# Altium PCB pcb1.PcbDoc (part 1 of 3)
Units mil, origin at the board's own origin, x right, y up, seen from the top; angles counter-clockwise.
Board outline 6735 x 5870 mil, 4 copper layers (Top Layer, Layer 1, Layer 2, Bottom Layer), stack 16.756 mil thick; 178 components, 184 nets, 959 pads, 712 vias.
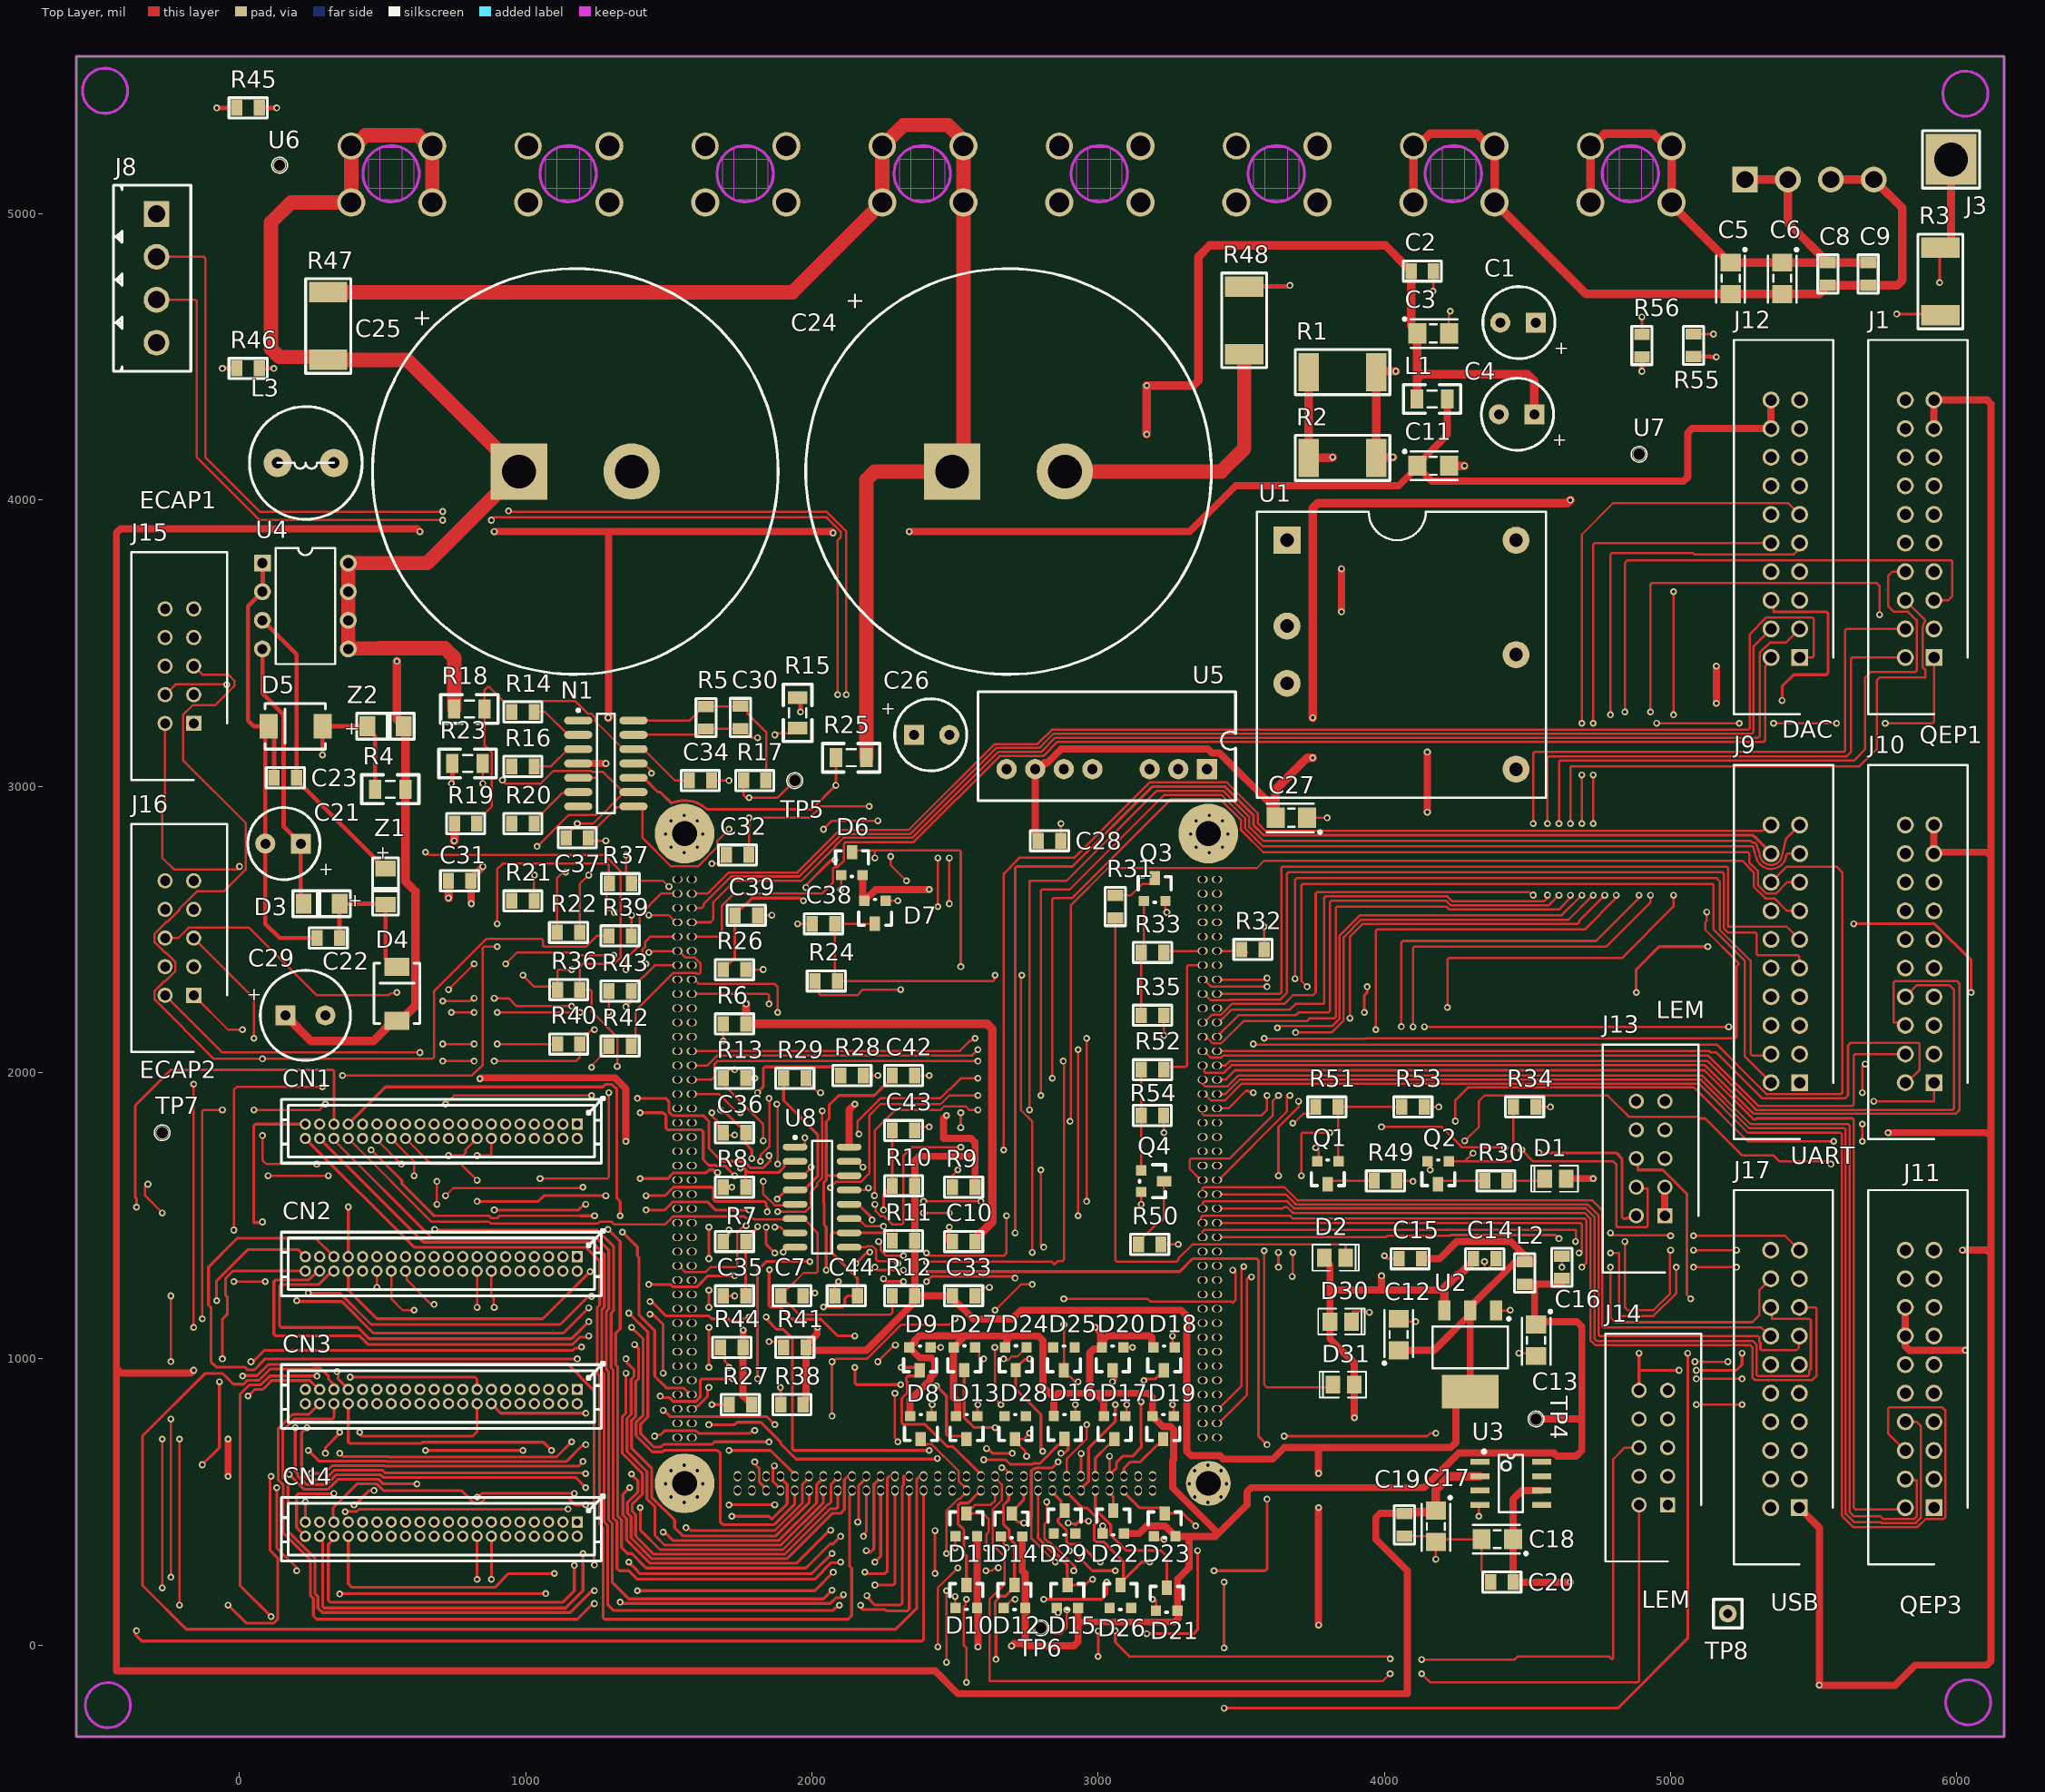
[diagram p0: Top Layer view]
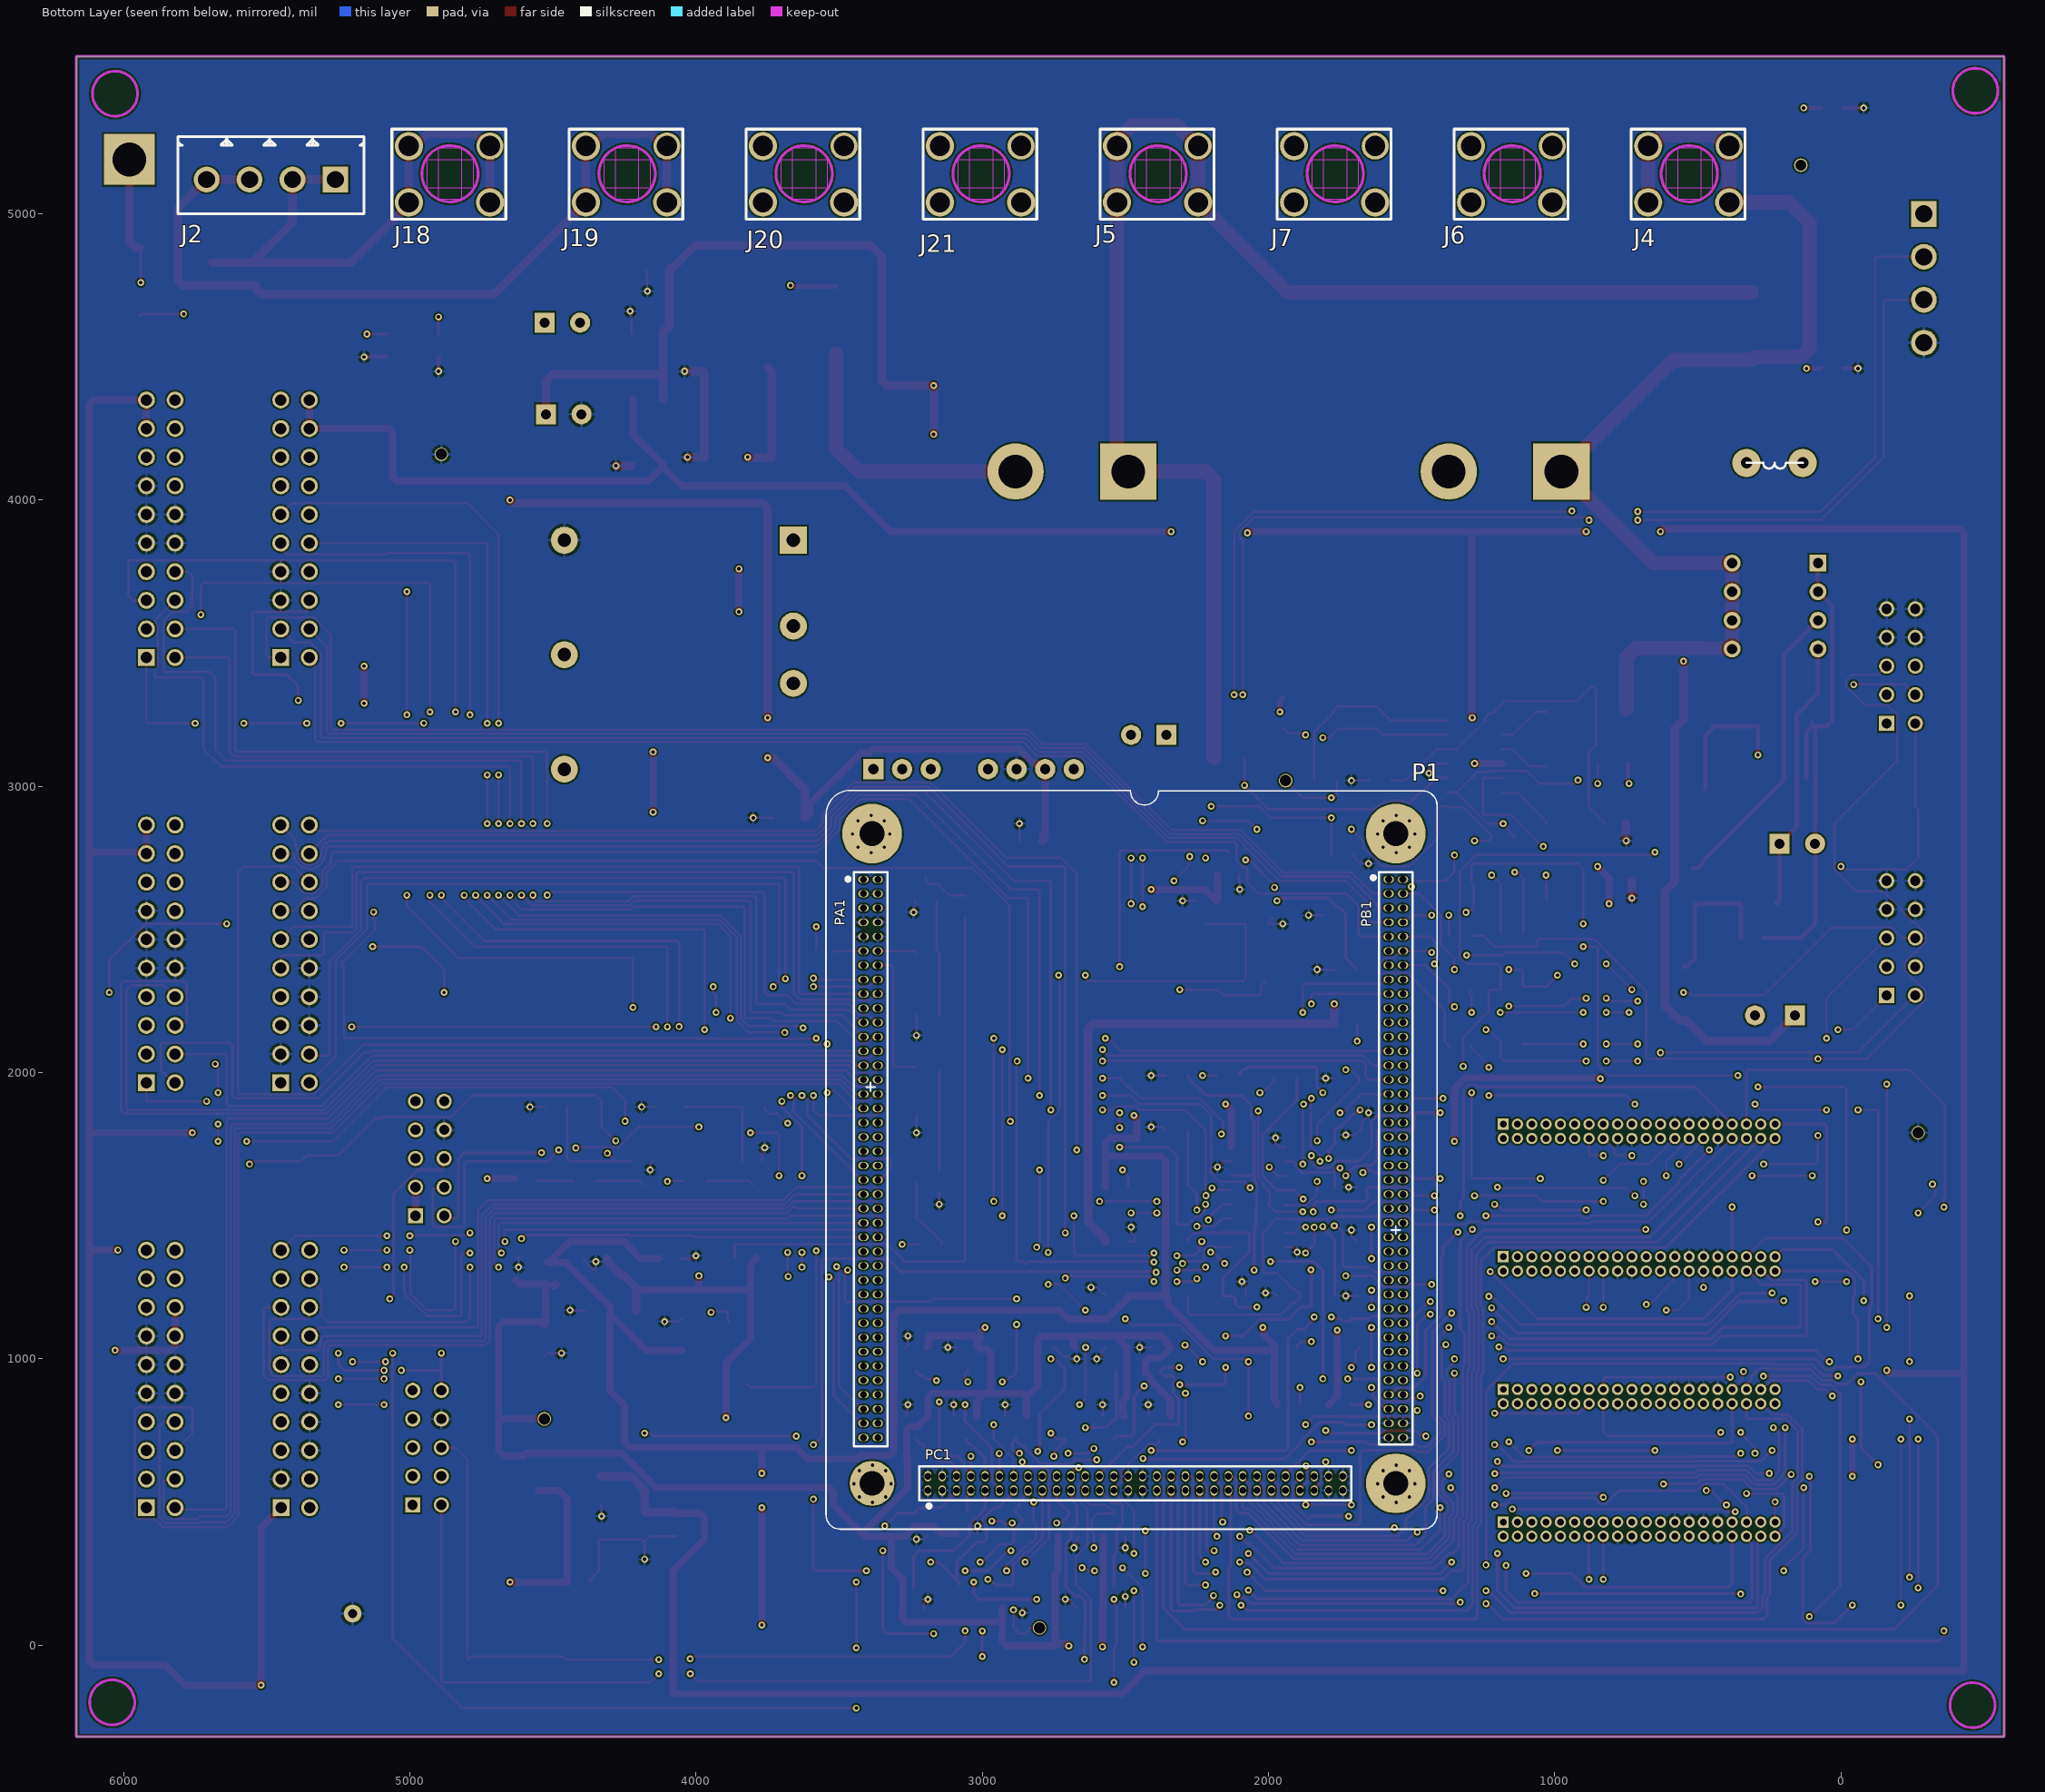
[diagram p1: Bottom Layer view, seen from below]
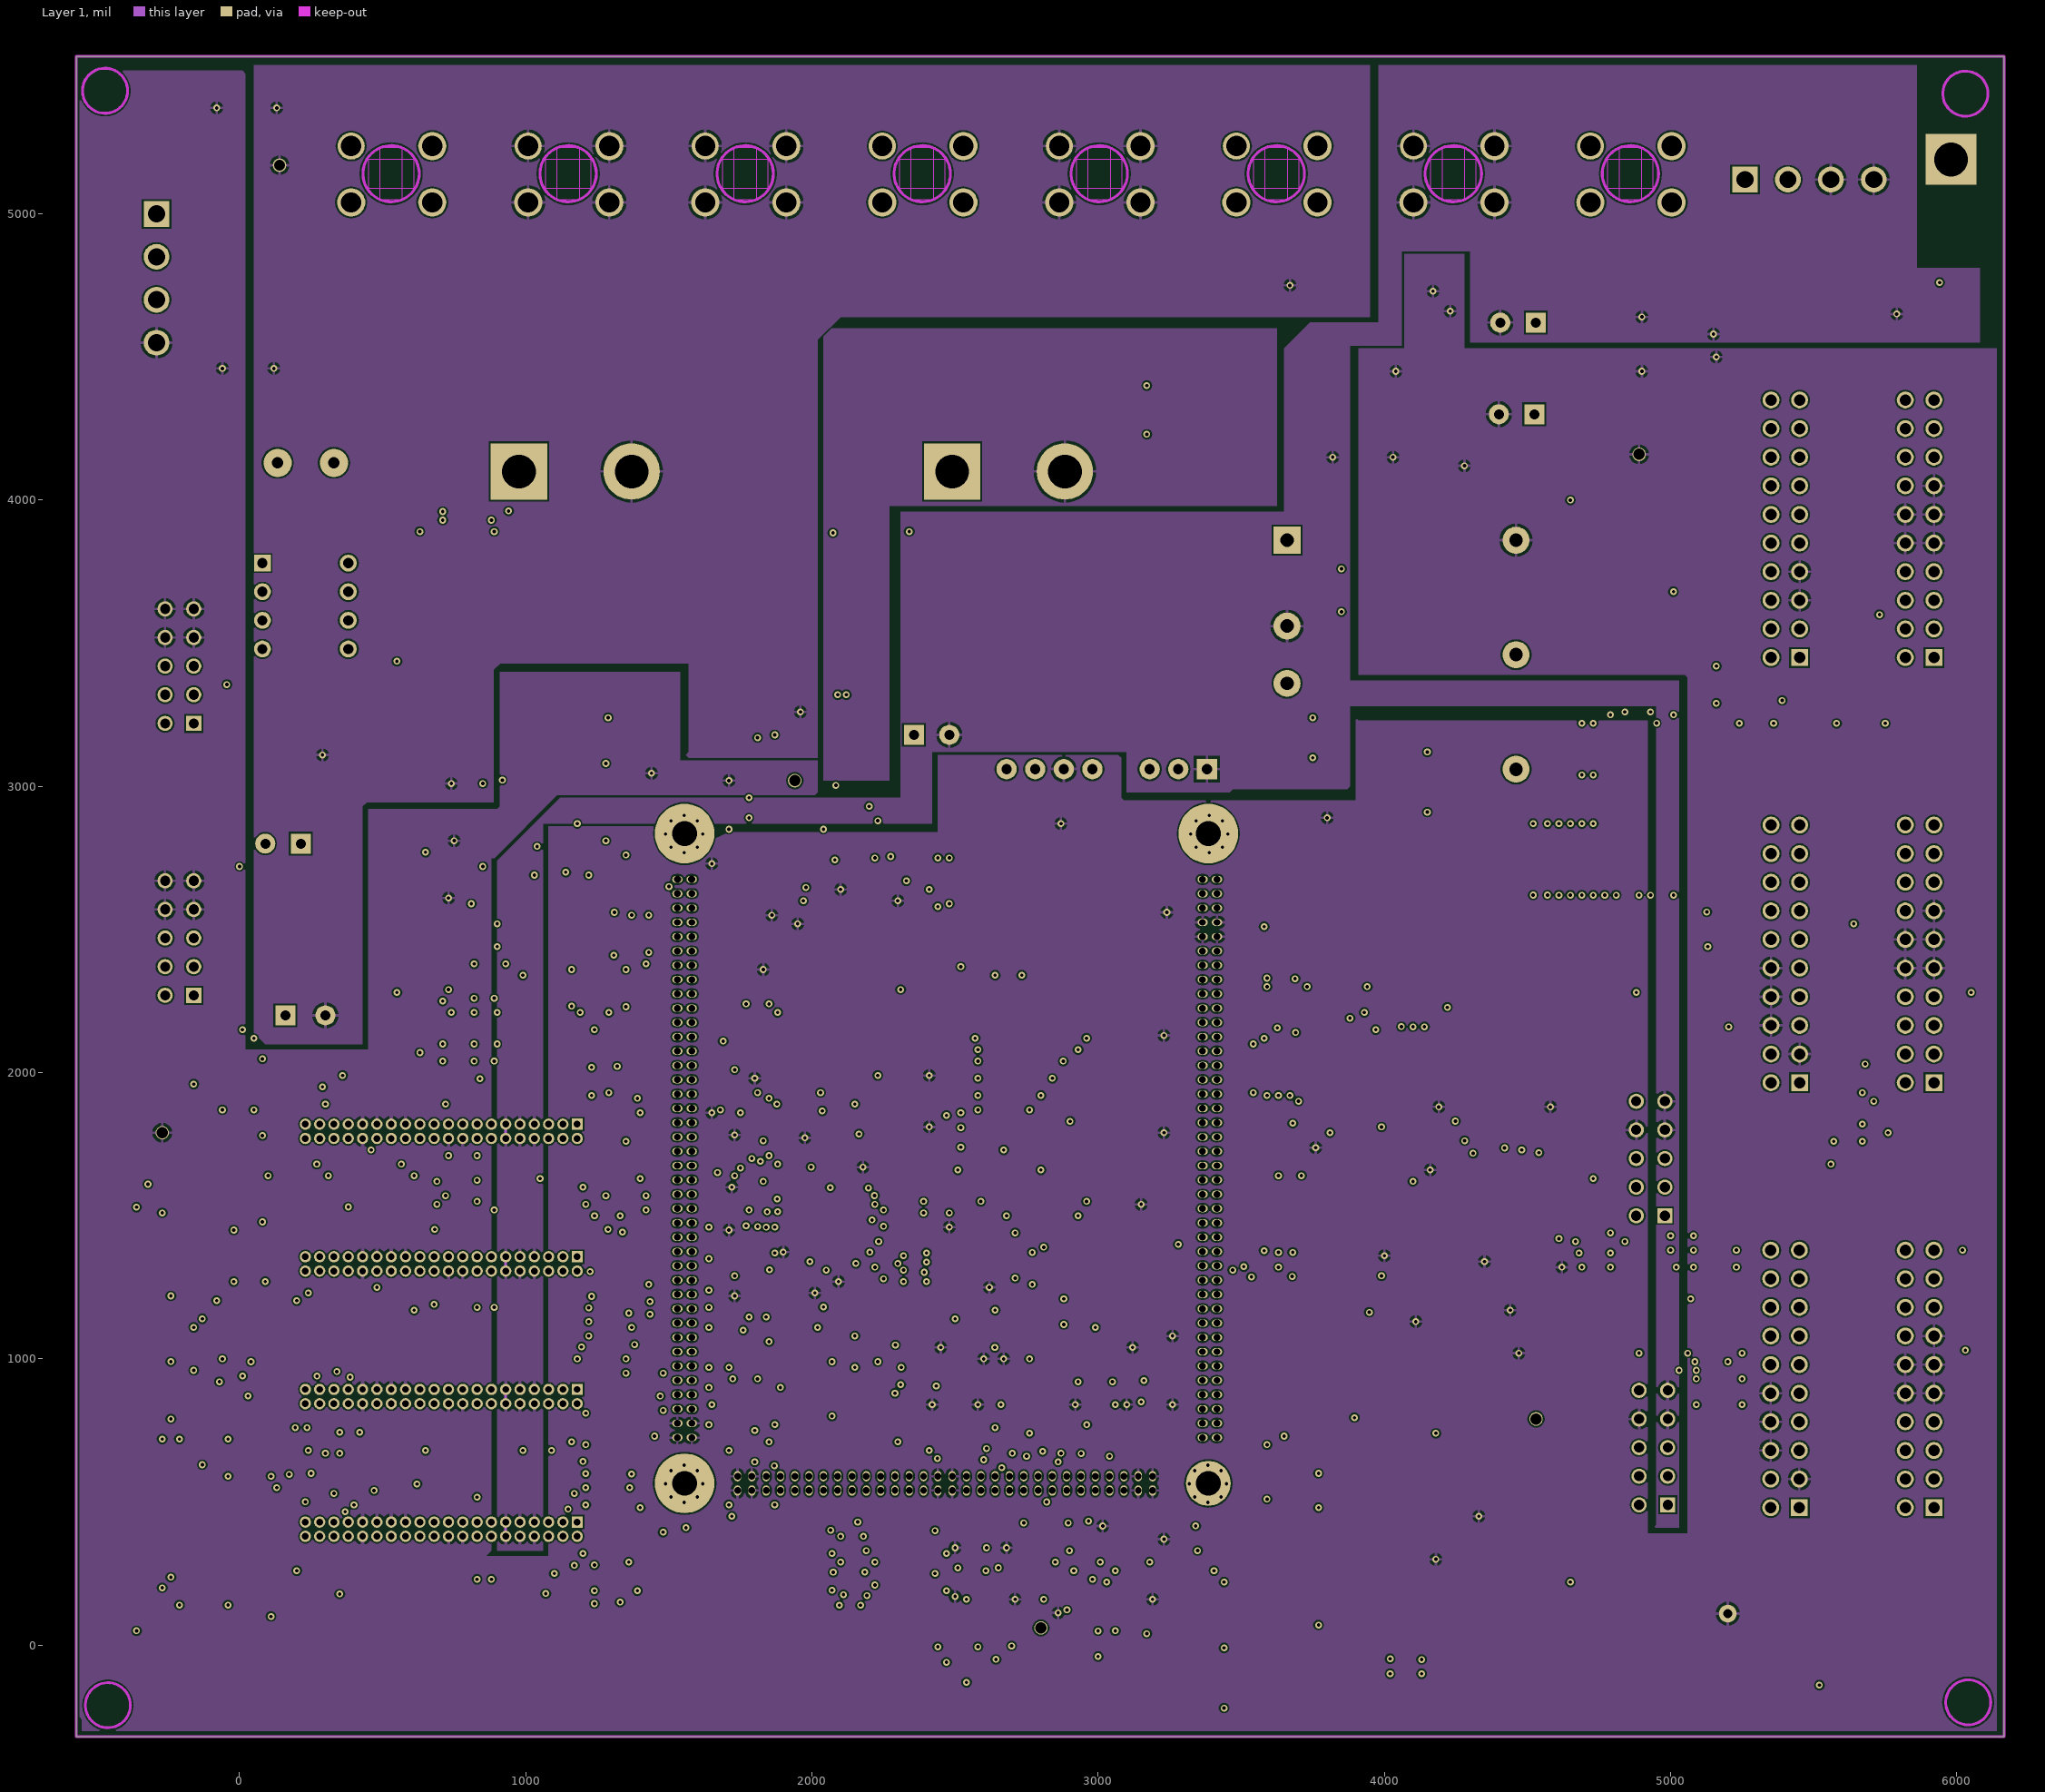
[diagram p2: Layer 1]
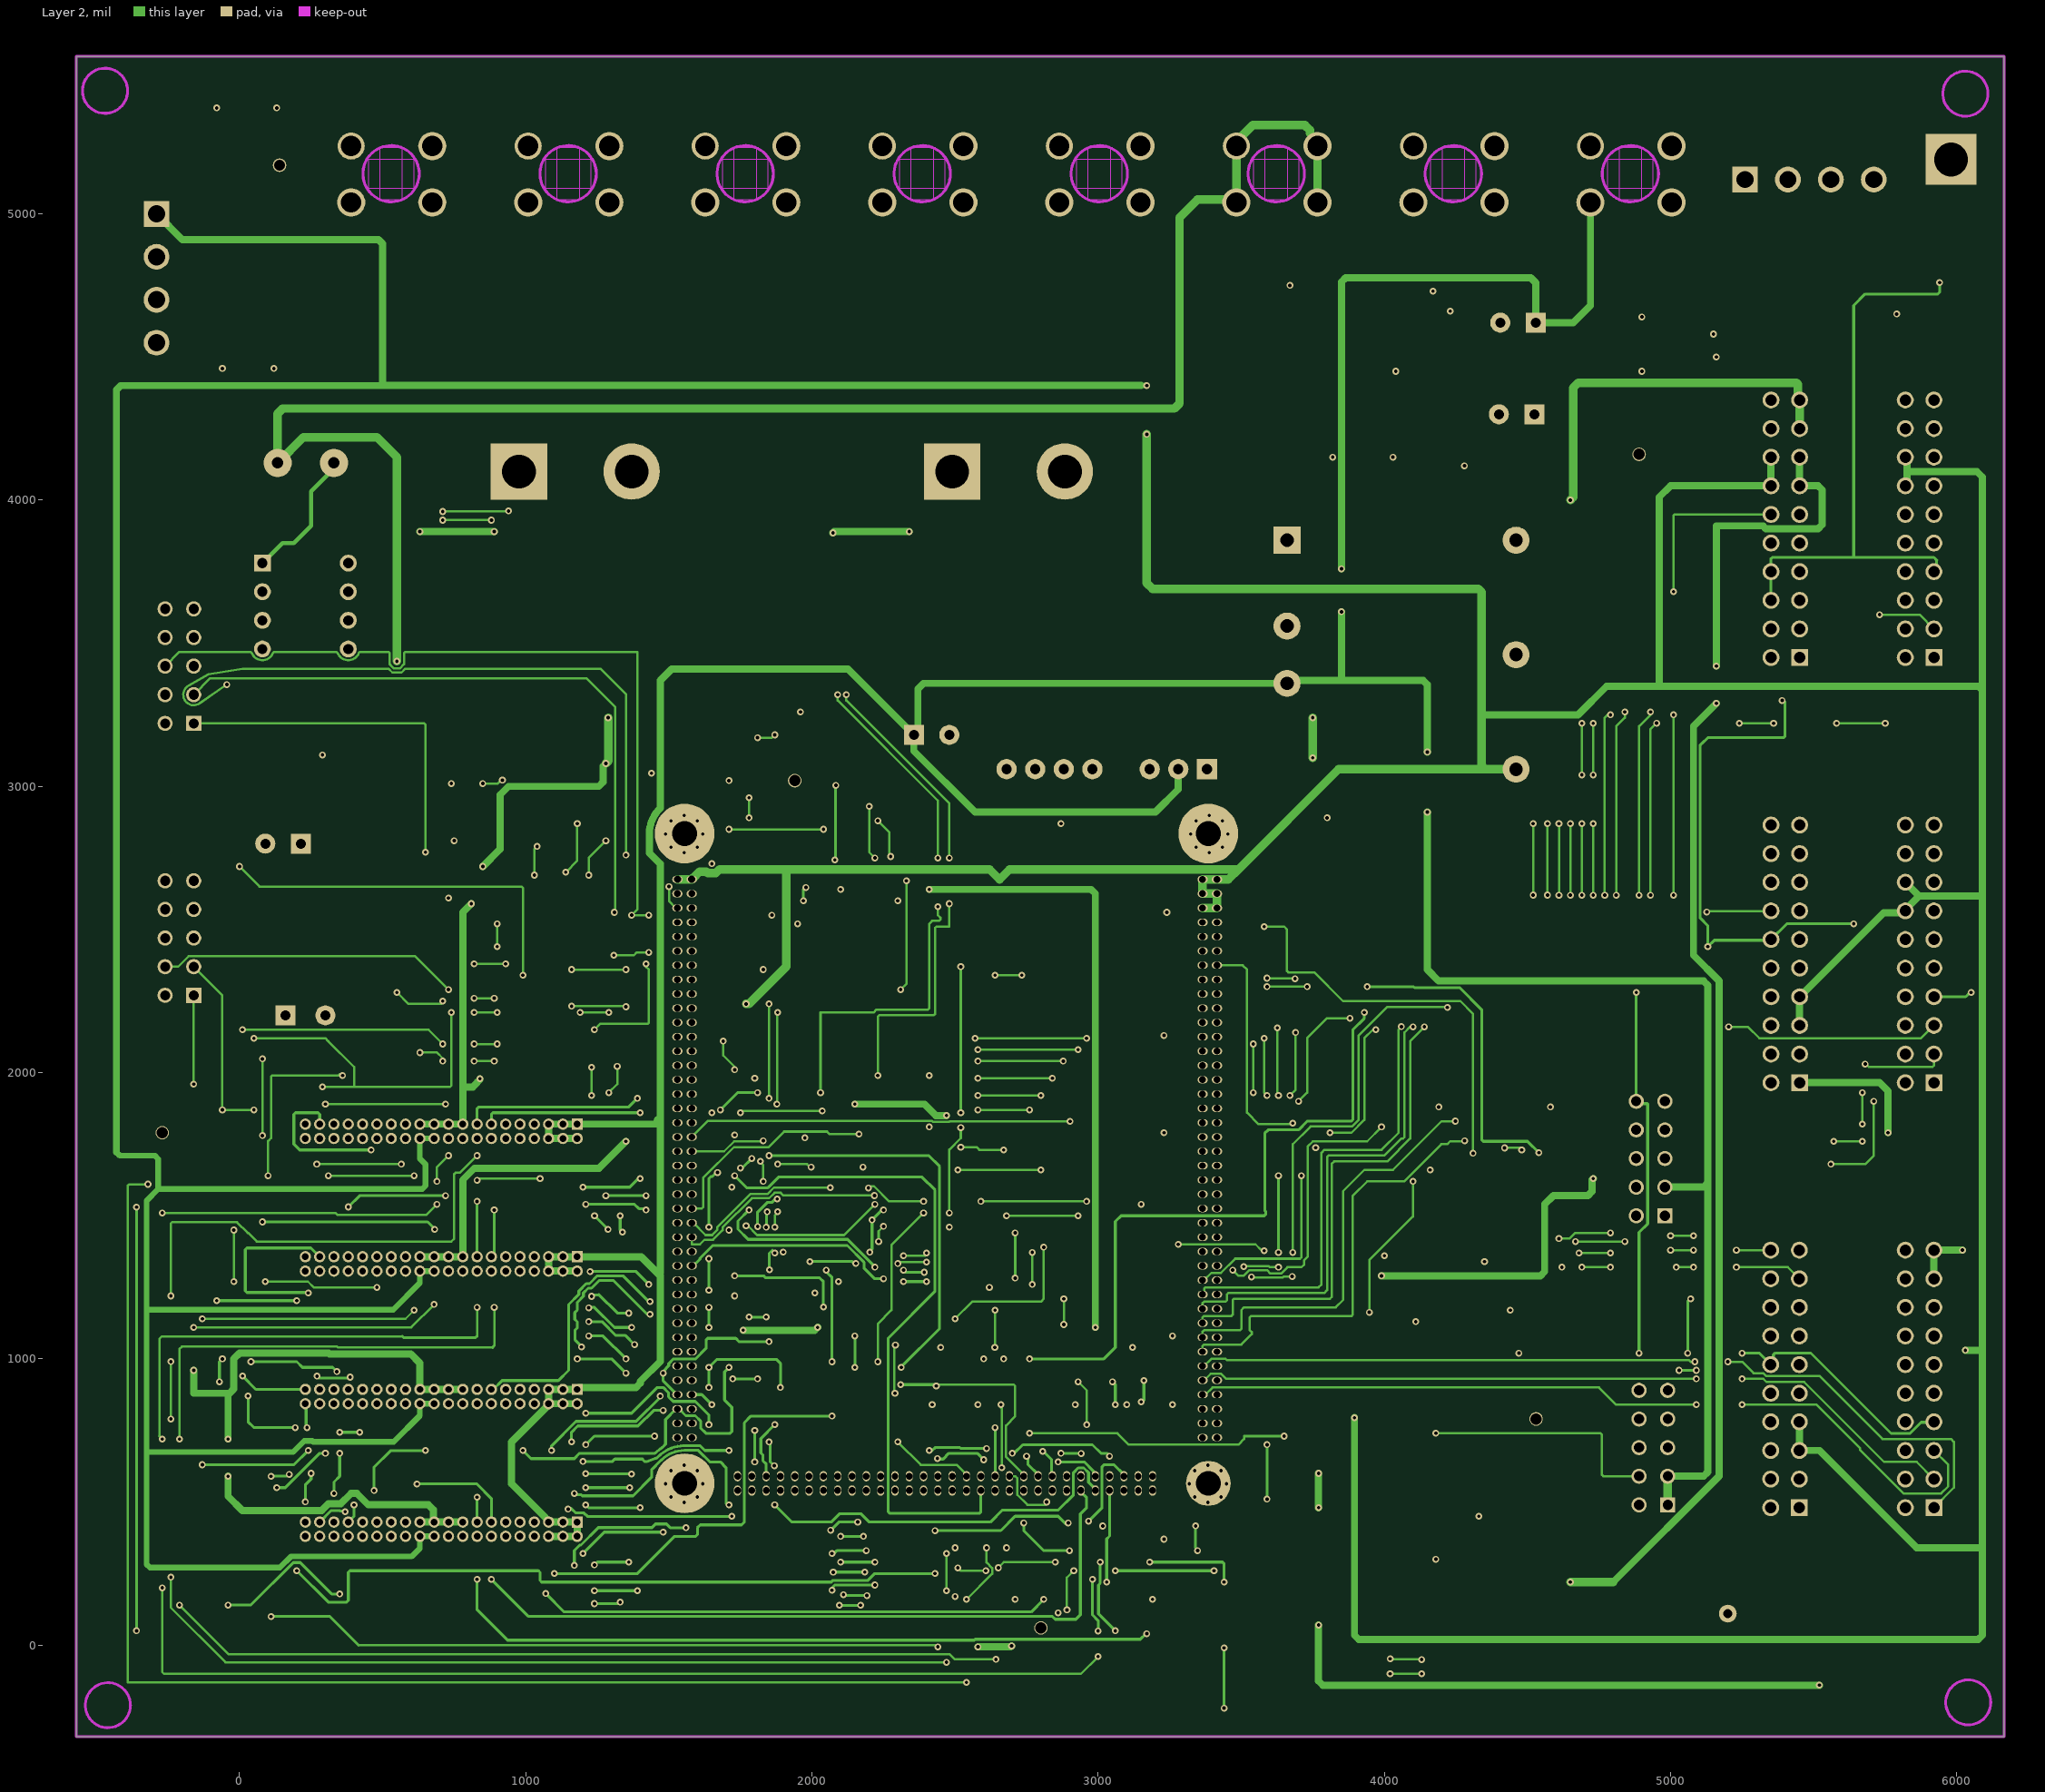
[diagram p3: Layer 2]

## Layer stack, top to bottom
Top Solder: solder mask 0.4, Solder Resist, Dk 3.5
Top Layer: signal copper 1.4
Dielectric 2: prepreg 2.8, PP-006, Dk 4.1
Layer 1: signal copper 1.378
Dielectric 1: dielectric 5.6, FR-4, Dk 4.8
Layer 2: signal copper 1.378
Dielectric 3: prepreg 2.8, PP-006, Dk 4.1
Bottom Layer: signal copper 1.4
Bottom Solder: solder mask 0.4, Solder Resist, Dk 3.5

## Board outline
-570,-320 -570,5550 6165,5550 6165,-320

## Design rules (kind name [scope] priority, off if disabled: settings)
Clearance [All] p1: gap=6 ignorepadtopadclearanceinfootprint=FALSE
HoleSize [All] p1: absolutevalues=TRUE maxlimit=120 minlimit=1 maxpercent=80.000 minpercent=20.000
MinimumSolderMaskSliver [All] p1: minsoldermaskwidth=0
PolygonConnect [All] p1: connectstyle=Relief reliefconductorwidth=10 reliefentries=4 polygonreliefangle="90 Angle" airgapwidth=10
RoutingVias [All] p1: holewidth=12 width=24 viastyle="Through Hole" minholewidth=10 minwidth=20 maxholewidth=120 maxwidth=150
SilkToSilkClearance [All] p1: silktosilkclearance=0
SilkToSolderMaskClearance [IsPad] p1: minsilkscreentomaskgap=0 clearancetoexposedcopper=TRUE
SolderMaskExpansion [All] p1: expansion=4 istentingtop=FALSE
Width [All] p1: maxlimit=60 minlimit=5 preferedwidth=15
26 further rules are at their usual default settings.

## Classes and differential pairs
net class SectionConnector: -5V_ADC \S\P\I\_\C\_\S\T\E\_\H\S A+5V AGND AVDD D12V1 D12VGND D+5V DSP-PWM1A DSP-PWM1B DSP-PWM2A DSP-PWM2B DSP-PWM3A DSP-PWM3B DSP-PWM4A DSP-PWM4B DSP-PWM5A DSP-PWM5B DSP-PWM6A DSP-PWM6B DSP-PWM7A DSP-PWM7B DSP-PWM8A DSP-PWM8B DSP-PWM9A DSP-PWM9B DSP-PWM10A DSP-PWM10B DSP-PWM11A DSP-PWM11B DSP-PWM12A DSP-PWM12B DSP_A_CAN_RX DSP_A_CAN_TX DSP_B_CAN_RX DSP_B_CAN_TX DSP_PWM1_\E\N\A\B\L\E DSP_PWM1_F\A\U\L\T\_\5\V\ DSP_PWM2_\E\N\A\B\L\E DSP_PWM2_F\A\U\L\T\_\5\V\ DSP_PWM3_\E\N\A\B\L\E DSP_PWM3_F\A\U\L\T\_\5\V\ DSP_PWM4_\E\N\A\B\L\E DSP_PWM4_F\A\U\L\T\_\5\V\ IPM_IU1 IPM_IU2 IPM_IU3 IPM_IU4 IPM_IV1 IPM_IV2 IPM_IV3 IPM_IV4 IPM_IW1 IPM_IW2 IPM_IW3 IPM_IW4 IPM_Temperature1 IPM_Temperature2 IPM_Temperature3 IPM_Temperature4 IPM_TerminalDutyU1 IPM_TerminalDutyU2 IPM_TerminalDutyU3 IPM_TerminalDutyU4 IPM_TerminalDutyV1 IPM_TerminalDutyV2 IPM_TerminalDutyV3 IPM_TerminalDutyV4 IPM_TerminalDutyW1 IPM_TerminalDutyW2 IPM_TerminalDutyW3 IPM_TerminalDutyW4 MQEP1A MQEP1B MQEP1S MQEP1Z MQEP2A MQEP2B MQEP2S MQEP2Z MQEP3A MQEP3B MQEP3S MQEP3Z NetU3_1 NetU3_3 NetU3_5 NetU3_7 NetU3_8 NetU5_3 NetU5_5 NetU5_8 PE_GND QEP1_HALL_U QEP1_HALL_V QEP1_HALL_W QEP2_HALL_U QEP2_HALL_V QEP2_HALL_W QEP3_HALL_U QEP3_HALL_V QEP3_HALL_W REF_3V S\P\I\_\A\_\S\T\E\_\H\S\ SPI_A_CK_HS SPI_A_MI_HS SPI_A_MO_HS SPI_C_CK_HS SPI_C_MI_HS SPI_C_MO_HS UART_SCI_RXDA UART_SCI_RXDB UART_SCI_RXDC UART_SCI_RXDD UART_SCI_TXDA UART_SCI_TXDB UART_SCI_TXDC UART_SCI_TXDD VCO_ECAP1 VCO_ECAP2 VCO_ECAP3 VCO_ECAP4 VCO_ECAP5 VCO_ECAP6 VDD
net class HV: DC_BUS DC_BUS_SUS GND GND_SUS

## Components (designator, comment, footprint, x,y, rotation, side; value= is the part's Value field where it differs from the comment)
C1 "100uf 25V 贴片铝电解" "CAP/6.4mm -" 4570,4620 r180 top
C2 "105" 0805 4132.78,4800 r0 top value=0.1UF
C3 "22uf 16V" "1206 (钽电容)" 4115.61,4582.34 r0 top
C4 "100uf 25V 贴片铝电解" "CAP/6.4mm -" 4565,4300 r180 top
C5 "22uf 16V" "1206 (钽电容)" 5210,4830 r270 top
C6 "22uf 16V" "1206 (钽电容)" 5390,4830 r270 top
C7 "103" 0805 1930,1220 r0 top
C8 "104" 0805 5550,4790 r90 top
C9 "104" 0805 5690,4790 r90 top
C10 "104" 0805 2530,1410 r0 top
C11 "22uf 16V" "1206 (钽电容)" 4115.61,4120 r0 top
C12 "22uf 16V" "1206 (钽电容)" 4050,1029.76 r90 top
C13 "10uf 6.3V" "1206 (钽电容)" 4530,1120.24 r270 top
C14 "104" 0805 4350.63,1350 r180 top
C15 "104" 0805 4090,1350 r0 top
C16 "104" 0805 4620,1320 r270 top
C17 "106 25V" "1206 (钽电容)" 4180,470.24 r270 top value=100pF
C18 "106 25V" "1206 (钽电容)" 4450,370 r180 top value=100pF
C19 "104" 0805 4070,420 r90 top
C20 "104" 0805 4410.63,220 r0 top
C21 "10uF/35V" "CAP/6.4mm -" 255,2800 r180 top
C22 "104" 0805 310,2470 r0 top
C23 "223" 0805 160,3030 r0 top
C24 "390uF/450V" CAP/30mm 2686.85,4100 r0 top
C25 "390uF/450V" CAP/30mm 1173.15,4100 r0 top
C26 "100uf 25V 贴片铝电解" "CAP/6.4mm -" 2315,3180 r0 top
C27 "22uf 16V" "1206 (钽电容)" 3730.24,2890 r180 top
C28 "104" 0805 2830,2810 r180 top value=0.1UF
C29 "470uF/25V" CAP/8mm 130,2200 r0 top
C30 "102" 0805 1750,3240.63 r90 top value=1nF
C31 "104" 0805 769.08,2670 r0 top
C32 "103" 0805 1740,2760 r0 top value=0.01uF
C33 "104" 0805 2530,1220 r0 top value=0.1uF
C34 "102" 0805 1610,3020 r180 top value=1nF
C35 "103" 0805 1729.37,1220 r0 top
C36 "103" 0805 1729.37,1790 r0 top
C37 "102" 0805 1180,2820 r0 top value=1nF
C38 "103" 0805 2040,2520 r0 top value=0.01uF
C39 "102" 0805 1770.63,2550 r180 top value=1nF
C42 "101" 0805 2320,1990 r0 top
C43 "101" 0805 2320,1797.5 r0 top
C44 "101" 0805 2120,1220 r180 top
CN1 "3131-40SG0BK00T1" IDC-TH_3131-40SG0BK00T1 705,1795 r180 top
CN2 "3131-40SG0BK00T1" IDC-TH_3131-40SG0BK00T1 705,1331.67 r180 top
CN3 "3131-40SG0BK00T1" IDC-TH_3131-40SG0BK00T1 705,868.33 r180 top
CN4 "3131-40SG0BK00T1" IDC-TH_3131-40SG0BK00T1 705,405 r180 top
D1 "LEDRED" L0805 4634.8,1629.28 r0 top
D2 "LEDGREEN" L0805 3790,1353.33 r180 top
D3 "1N4148" LL4148 287.01,2590 r180 top
D4 "MURS220T3" DO214AA 550.26,2181.31 r90 top
D5 "MURS220T3" DO214AA 290,3210 r180 top
D6 "BAR43S" SOT-23 2102.02,2690.41 r0 top
D7 "BAR43S" SOT-23 2257.98,2599.59 r180 top
D8 "BAR43S" SOT-23 2417.98,799.59 r180 top
D9 "BAR43S" SOT-23 2414.98,1039.59 r180 top
D10 "BAR43S" SOT-23 2502.02,130.41 r0 top
D11 "BAR43S" SOT-23 2502.02,380.41 r0 top
D12 "BAR43S" SOT-23 2670,130 r0 top
D13 "BAR43S" SOT-23 2577.98,799.59 r180 top
D14 "BAR43S" SOT-23 2660,380 r0 top
D15 "BAR43S" SOT-23 2855.02,130.41 r0 top
D16 "BAR43S" SOT-23 2920,800 r180 top
D17 "BAR43S" SOT-23 3094.98,799.59 r180 top
D18 "BAR43S" SOT-23 3267.98,1039.59 r180 top
D19 "BAR43S" SOT-23 3264.98,799.59 r180 top
D20 "BAR43S" SOT-23 3087.98,1039.59 r180 top
D21 "BAR43S" SOT-23 3202.02,120.41 r0 top
D22 "BAR43S" SOT-23 3015.02,390.41 r0 top
D23 "BAR43S" SOT-23 3195.02,380.41 r0 top
D24 "BAR43S" SOT-23 2750,1040 r180 top
D25 "BAR43S" SOT-23 2917.98,1039.59 r180 top
D26 "BAR43S" SOT-23 3040,130 r0 top
D27 "BAR43S" SOT-23 2570,1040 r180 top
D28 "BAR43S" SOT-23 2747.98,799.59 r180 top
D29 "BAR43S" SOT-23 2845.02,390.41 r0 top
D30 "LEDRED" L0805 3810,1130 r180 top
D31 "LEDGREEN" L0805 3894.8,910 r0 top
J1 "HIF3FC-20PA-2.54DSA" SHDR20W56P254_2X10_3290X850X950P 5920,3450 r90 top
J2 "Header 4" 381S-4 5260,5120 r0 bottom
J3 "Header 2" 接地柱M3 5980,5190 r0 top
J4 "Header 2" PCB焊接端子 669.53,5020.31 r90 bottom
J5 "Header 2" PCB焊接端子 2525.24,5020.31 r90 bottom
J6 "Header 2" PCB焊接端子 1288.1,5020.31 r90 bottom
J7 "Header 2" PCB焊接端子 1906.67,5020.31 r90 bottom
J8 "Header 4" 381S-4 -290,5000 r270 top
J9 "HIF3FC-20PA-2.54DSA" SHDR20W56P254_2X10_3290X850X950P 5450.91,1965 r90 top
J10 "HIF3FC-20PA-2.54DSA" SHDR20W56P254_2X10_3290X850X950P 5920,1965 r90 top
J11 "HIF3FC-20PA-2.54DSA" SHDR20W56P254_2X10_3290X850X950P 5920,480 r90 top
J12 "HIF3FC-20PA-2.54DSA" SHDR20W56P254_2X10_3290X850X950P 5450.91,3450 r90 top
J13 "HIF3FC-10PA-2.54DSA" SHDR10W50P254_2X5_2020X850X920P 4980,1500 r90 top
J14 "HIF3FC-10PA-2.54DSA" SHDR10W50P254_2X5_2020X850X920P 4990,490 r90 top
J15 "HIF3FC-10PA-2.54DSA" SHDR10W50P254_2X5_2020X850X920P -160,3220 r90 top
J16 "HIF3FC-10PA-2.54DSA" SHDR10W50P254_2X5_2020X850X920P -160,2270 r90 top
J17 "HIF3FC-20PA-2.54DSA" SHDR20W56P254_2X10_3290X850X950P 5450,480 r90 top
J18 "Header 2" PCB焊接端子 4999.53,5020.31 r90 bottom
J19 "Header 2" PCB焊接端子 4380.96,5020.31 r90 bottom
J20 "Header 2" PCB焊接端子 3762.38,5020.31 r90 bottom
J21 "Header 2" PCB焊接端子 3143.81,5020.31 r90 bottom
L1 "CIB31P310NE" 1206 4113.7,4353.23 r0 top
L2 "BLM21PG221SH1D" 0805 4490,1300 r270 top value=BLM21PG221SH1
L3 "2.2mH工字/3A" L\5\10 133.15,4130 r0 top
N1 "MCP6024" SOIC14_M 1280,3080 r0 top
P1 "TMS320F28377D-BGA-Core" DSP_240_0p6mm 3185,15 r180 bottom
Q1 "FMMT618TA" SOT-23 3840,1689.59 r180 top
Q2 "FMMT618TA" SOT-23 4225.76,1689.59 r180 top
Q3 "FMMT618TA" SOT-23 3160,2600 r0 top
Q4 "FMMT618TA" SOT-23 3150.41,1657.98 r270 top
R1 "DNP" 2512 3850,4460 r0 top
R2 "DNP" 2512 3850,4160 r0 top
R3 "DNP" 2512 5930,4760 r90 top
R4 "2K" 1206 580,2990 r180 top
R5 "10K" 0805 1630,3240 r90 top
R6 "1.69K" 0805 1729.37,2170 r0 top value=300R
R7 "1K" 0805 1729.37,1410 r180 top
R8 "1K" 0805 1729.37,1600 r180 top
R9 "1K" 0805 2530,1600 r180 top
R10 "1K" 0805 2320,1605 r180 top
R11 "1K" 0805 2320,1412.5 r180 top
R12 "1K" 0805 2320,1220 r180 top
R13 "3,.3K" 0805 1729.37,1980 r180 top value=300R
R14 "0R" 0805 990,3260 r180 top
R15 "2004" 1206 1950,3310 r270 top value=2M
R16 "0R" 0805 990,3070 r180 top
R17 "1k" 0805 1800,3020 r180 top value=1K
R18 "2004" 1206 750,3270 r0 top value=2M
R19 "10K" 0805 790,2870 r0 top
R20 "0R" 0805 990,2870 r180 top
R21 "0R" 0805 990,2600 r180 top
R22 "10K" 0805 1149.37,2490 r0 top
R23 "2004" 1206 743.7,3080 r0 top value=2M
R24 "1k" 0805 2050,2320 r0 top value=1K
R25 "2004" 1206 2190,3100 r180 top value=2M
R26 "10K" 0805 1729.37,2360 r180 top
R27 "10K" 0805 1750,840 r0 top
R28 "100R" 0805 2140,1990 r180 top
R29 "100R" 0805 1940,1980 r180 top
R30 "301R" 0805 4389.59,1621.43 r0 top value=300R
R31 "301R" 0805 3060,2580 r270 top value=300R
R32 "10K" 0805 3540.63,2430 r180 top
R33 "10K" 0805 3190,2420 r0 top
R34 "2K" 0805 4490,1880 r0 top
R35 "2K" 0805 3190,2200 r0 top
R36 "0R" 0805 1150,2290 r0 top
R37 "0R" 0805 1330.63,2660 r180 top
R38 "10K" 0805 1930,840 r0 top
R39 "0R" 0805 1329.37,2477.5 r180 top
R40 "0R" 0805 1150,2100 r180 top
R41 "10K" 0805 1940,1040 r0 top
R42 "0R" 0805 1329.37,2092.5 r180 top
R43 "0R" 0805 1329.37,2285 r180 top
R44 "10K" 0805 1720,1040 r0 top
R45 "0R" 0805 30,5370 r180 top
R46 "0R" 0805 30,4460 r180 top
R47 "DNP" 2512 322.74,4611.91 r270 top
R48 "DNP" 2512 3497.26,4624.31 r90 top
R49 "301R" 0805 4003.83,1621.43 r0 top value=300R
R50 "301R" 0805 3180,1400 r0 top value=300R
R51 "10K" 0805 3799.37,1880 r180 top
R52 "10K" 0805 3190,2010 r0 top
R53 "2K" 0805 4100,1880 r0 top
R54 "2K" 0805 3189.37,1850 r0 top
R55 "0R" 0805 5080,4540.63 r270 top
R56 "0R" 0805 4900,4540 r270 top
TP4 "TP-黄色测试点" TESTPOINT-TH_BD1.0#1 4530,790 r90 top
TP5 "TP-黄色测试点" TESTPOINT-TH_BD1.0#1 1940,3020 r90 top
TP6 "TP-黄色测试点" TESTPOINT-TH_BD1.0#1 2800,60 r90 top
TP7 "TP-黄色测试点" TESTPOINT-TH_BD1.0#1 -270,1790 r90 top
TP8 "AGND 黑色测试点" TP 5200,110 r0 top
U1 "URB2405YMD-15W" URB-YMD-15WR3 3660,3860 r0 top
U2 "ams1117-3.3" SOT-223 4300,1040 r180 top
U3 "ADR423ARZ" SOIC-8 4333.46,640 r0 top value=Value
U4 "VIPER22A" DIP8 230,3630 r270 top
U5 "VRB1205S-6WR3" VRB_S-6WR3 3380,3060 r270 top
U6 "TP-黄色测试点" TESTPOINT-TH_BD1.0#2 140,5170 r0 top
U7 "TP-黄色测试点" TESTPOINT-TH_BD1.0#1 4890,4160 r0 top
U8 "SN74HC365D" D016_N 2035.51,1565 r0 top
Z1 "15V -ZM4744" LL4148 510,2650 r270 top
Z2 "15V-ZM4744" LL4148 510,3210 r0 top

## Footprints (in the part's own frame and the unit in brackets; to place one, negate y for a bottom-side part, rotate by r counter-clockwise, add the part's x,y. Pads: shape width x height; smd on the part's side, far side on the other; paste and mask are expansions set on the pad)
381S-4 [mil]
  rect 90x90 hole 60: 1(0,0)
  round 90 hole 60: 2(150,0) 3(300,0) 4(450,0)
  silkscreen extent -100,-150 550,120
0805 [mm]
  rect 1x1.4 smd: 1(-1,0) 2(1,0)
  silkscreen extent -1.7,-0.9 1.7,0.9
1206 [mm]
  rect 1.1x1.7 smd: 1(0,0) 2(2.7,0)
  silkscreen extent -1.19,-1.27 3.89,1.27, body extent -0.35,-0.9 3.05,0.9, height 1.3
"1206 (钽电容)" [mm]
  rect 1.6x1.8 smd: 1(0,0) 2(2.8,0)
  silkscreen extent -1.27,-1.27 3.56,1.39
2512 [mm]
  rect 1.8x3.4 smd: 1(-2.903,-0.324) 2(3.097,-0.324)
  silkscreen extent -4.1,-2.32 4.3,1.68
"CAP/6.4mm -" [mil]
  rect 70x70 hole 35: 1(41,0)
  round 70 hole 35: 2(165,0)
  silkscreen extent -26,-126 226,126
CAP/8mm [mil]
  rect 70x70 hole 35: 1(30,0)
  round 70 hole 35: 2(170,0)
  silkscreen extent -57,-157 257,157
CAP/30mm [mm]
  rect 5x5 hole 3: 1(-5,0)
  round 5 hole 3: 2(5,0)
  silkscreen extent -18,-18 18,18
D016_N [mm]
  oval 2.2x0.6 smd: 1(-2.4,4.445) 2(-2.4,3.175) 3(-2.4,1.905) 4(-2.4,0.635) 5(-2.4,-0.635) 6(-2.4,-1.905) 7(-2.4,-3.175) 8(-2.4,-4.445) 9(2.4,-4.445) 10(2.4,-3.175) 11(2.4,-1.905) 12(2.4,-0.635) 13(2.4,0.635) 14(2.4,1.905) 15(2.4,3.175) 16(2.4,4.445)
  silkscreen extent -2.52,-5 0.9,5.42
DIP8 [mm]
  rect 1.5x1.5 hole 0.9: 1(-3.81,-3.81)
  round 1.5 hole 0.9: 2(-1.27,-3.81) 3(1.27,-3.81) 4(3.81,-3.81) 5(3.81,3.81) 6(1.27,3.81) 7(-1.27,3.81) 8(-3.81,3.81)
  silkscreen extent -5.15,-2.65 5.15,2.65
DO214AA [mm]
  rect 1.6x2.2 smd: 1(-0.007,0.007) 2(4.793,0.007)
  silkscreen extent -0.26,-2.03 5.11,2.04
DSP_240_0p6mm [mil] "The hole size is reduced to 0.6 mm"
  oval 36x25 hole 23.62: 1(-230,2660) 2(-180,2660) 3(-230,2610) 4(-180,2610) 5(-230,2560) 6(-180,2560) 7(-230,2510) 8(-180,2510) 9(-230,2460) 10(-180,2460) 11(-230,2410) 12(-180,2410) 13(-230,2360) 14(-180,2360) 15(-230,2310) 16(-180,2310) 17(-230,2260) 18(-180,2260) 19(-230,2210) 20(-180,2210) 21(-230,2160) 22(-180,2160) 23(-230,2110) 24(-180,2110) 25(-230,2060) 26(-180,2060) 27(-230,2010) 28(-180,2010) 29(-230,1960) 30(-180,1960) 31(-230,1910) 32(-180,1910) 33(-230,1860) 34(-180,1860) 35(-230,1810) 36(-180,1810) 37(-230,1760) 38(-180,1760) 39(-230,1710) 40(-180,1710) 41(-230,1660) 42(-180,1660) 43(-230,1610) 44(-180,1610) 45(-230,1560) 46(-180,1560) 47(-230,1510) 48(-180,1510) 49(-230,1460) 50(-180,1460) 51(-230,1410) 52(-180,1410) 53(-230,1360) 54(-180,1360) 55(-230,1310) 56(-180,1310) 57(-230,1260) 58(-180,1260) 59(-230,1210) 60(-180,1210) 61(-230,1160) 62(-180,1160) 63(-230,1110) 64(-180,1110) 65(-230,1060) 66(-180,1060) 67(-230,1010) 68(-180,1010) 69(-230,960) 70(-180,960) 71(-230,910) 72(-180,910) 73(-230,860) 74(-180,860) 75(-230,810) 76(-180,810) 77(-230,760) 78(-180,760) 79(-230,710) 80(-180,710) 83(1605,2610) 84(1655,2610) 85(1605,2560) 86(1655,2560) 87(1605,2510) 88(1655,2510) 89(1605,2460) 90(1655,2460) 91(1605,2410) 92(1655,2410) 93(1605,2360) 94(1655,2360) 95(1605,2310) 96(1655,2310) 97(1605,2260) 98(1655,2260) 99(1605,2210) 100(1655,2210) 101(1605,2160) 102(1655,2160) 103(1605,2110) 104(1655,2110) 105(1605,2060) 106(1655,2060) 107(1605,2010) 108(1655,2010) 109(1605,1960) 110(1655,1960) 111(1605,1910) 112(1655,1910) 113(1605,1860) 114(1655,1860) 115(1605,1810) 116(1655,1810) 117(1605,1760) 118(1655,1760) 119(1605,1710) 120(1655,1710) 121(1605,1660) 122(1655,1660) 123(1605,1610) 124(1655,1610) 125(1605,1560) 126(1655,1560) 127(1605,1510) 128(1655,1510) 129(1605,1460) 130(1655,1460) 131(1605,1410) 132(1655,1410) 133(1605,1360) 134(1655,1360) 135(1605,1310) 136(1655,1310) 137(1605,1260) 138(1655,1260) 139(1605,1210) 140(1655,1210) 141(1605,1160) 142(1655,1160) 143(1605,1110) 144(1655,1110) 145(1605,1060) 146(1655,1060) 147(1605,1010) 148(1655,1010) 149(1605,960) 150(1655,960) 151(1605,910) 152(1655,910) 153(1605,860) 154(1655,860) 155(1605,810) 156(1655,810) 157(1605,760) 158(1655,760) 159(1605,710) 160(1655,710)
  oval 36x25 hole 25.59: 81(1605,2660) 82(1655,2660)
  oval 25x36 hole 23.62: 161(-5,525) 162(-5,575) 163(45,525) 164(45,575) 165(95,525) 166(95,575) 167(145,525) 168(145,575) 169(195,525) 170(195,575) 171(245,525) 172(245,575) 173(295,525) 174(295,575) 175(345,525) 176(345,575) 177(395,525) 179(445,525) 180(445,575) 181(495,525) 182(495,575) 183(545,525) 184(545,575) 185(595,525) 186(595,575) 187(645,525) 188(645,575) 189(695,525) 190(695,575) 191(745,525) 192(745,575) 193(795,525) 194(795,575) 195(845,525) 196(845,575) 197(895,525) 198(895,575) 199(945,525) 200(945,575) 201(995,525) 202(995,575) 203(1045,525) 204(1045,575) 205(1095,525) 206(1095,575) 207(1145,525) 208(1145,575) 209(1195,525) 210(1195,575) 211(1245,525) 212(1245,575) 213(1295,525) 214(1295,575) 215(1345,525) 216(1345,575) 217(1395,525) 218(1395,575) 219(1445,525) 220(1445,575)
  oval 25x36 hole 23.62 paste+0: 178(395,575)
  round 208.66 hole 86.61: 261(-200,2820) 263(1630,550) 264(1630,2820)
  round 156.66 hole 86.61: 262(-200,550)
  silkscreen extent -361,390 1774,2971
IDC-TH_3131-40SG0BK00T1 [mm]
  rect 1x1 hole 0.6: 1(-12.065,-0.635)
  round 1 hole 0.6: 2(-12.065,0.635) 3(-10.795,-0.635) 4(-10.795,0.635) 5(-9.525,-0.635) 6(-9.525,0.635) 7(-8.255,-0.635) 8(-8.255,0.635) 9(-6.985,-0.635) 10(-6.985,0.635) 11(-5.715,-0.635) 12(-5.715,0.635) 13(-4.445,-0.635) 14(-4.445,0.635) 15(-3.175,-0.635) 16(-3.175,0.635) 17(-1.905,-0.635) 18(-1.905,0.635) 19(-0.635,-0.635) 20(-0.635,0.635) 21(0.635,-0.635) 22(0.635,0.635) 23(1.905,-0.635) 24(1.905,0.635) 25(3.175,-0.635) 26(3.175,0.635) 27(4.445,-0.635) 28(4.445,0.635) 29(5.715,-0.635) 30(5.715,0.635) 31(6.985,-0.635) 32(6.985,0.635) 33(8.255,-0.635) 34(8.255,0.635) 35(9.525,-0.635) 36(9.525,0.635) 37(10.795,-0.635) 38(10.795,0.635) 39(12.065,-0.635) 40(12.065,0.635)
  silkscreen extent -14.48,-3.05 14.2,2.82
L0805 [mm]
  rect 1.3x1.6 smd: 1(0,0) 2(-1.9,0)
  silkscreen extent -3.08,-1.15 1.05,1.15
L\5\10 [mm]
  round 2.5 hole 1: 1(5,0) 2(0,0)
  silkscreen extent -2.5,-5 7.5,5
LL4148 [mm]
  rect 1.4x1.8 smd: 1(-1.6,0) 2(1.6,0)
  silkscreen extent -2.54,-1.14 2.54,1.14
PCB焊接端子 [mm]
  round 2.5 hole 1.8: 1(0.5,-7.1) 1(0.5,0.1) 1(5.5,0.1)
  round 2.4 hole 1.8: 1(5.5,-7.1)
  Keep-Out Layer circle w0.254: c3.048,-3.556 r2.5
  Keep-Out Layer region: 0.762,-2.54 5.334,-2.54 5.334,-4.572 0.762,-4.572
  Keep-Out Layer region: 1.778,-1.524 4.318,-1.524 4.318,-5.588 1.778,-5.588
  Keep-Out Layer region: 2.54,-1.524
  silkscreen extent -1,-8.5 7,1.6
SHDR10W50P254_2X5_2020X850X920P [mm]
  rect 1.35x1.35 hole 0.9: 1(0,0)
  round 1.35 hole 0.9: 2(0,2.54) 3(2.54,0) 4(2.54,2.54) 5(5.08,0) 6(5.08,2.54) 7(7.62,0) 8(7.62,2.54) 9(10.16,0) 10(10.16,2.54)
  silkscreen extent -5.02,-2.98 15.18,5.52, body extent -5.02,-2.98 15.18,5.52, height 9.2
SHDR20W56P254_2X10_3290X850X950P [mm]
  rect 1.5x1.5 hole 1: 1(0,0)
  round 1.5 hole 1: 2(0,2.54) 3(2.54,0) 4(2.54,2.54) 5(5.08,0) 6(5.08,2.54) 7(7.62,0) 8(7.62,2.54) 9(10.16,0) 10(10.16,2.54) 11(12.7,0) 12(12.7,2.54) 13(15.24,0) 14(15.24,2.54) 15(17.78,0) 16(17.78,2.54) 17(20.32,0) 18(20.32,2.54) 19(22.86,0) 20(22.86,2.54)
  silkscreen extent -5.02,-2.98 28.18,5.82, body extent -5.02,-2.98 27.88,5.52, height 9.5
SOIC14_M [mm]
  oval 2.5x0.7 smd: 1(-2.45,3.81) 2(-2.45,2.54) 3(-2.45,1.27) 4(-2.45,0) 5(-2.45,-1.27) 6(-2.45,-2.54) 7(-2.45,-3.81) 8(2.45,-3.81) 9(2.45,-2.54) 10(2.45,-1.27) 11(2.45,0) 12(2.45,1.27) 13(2.45,2.54) 14(2.45,3.81)
  silkscreen extent -2.57,-4.4 0.8,4.83, body extent -2,-4.38 2,4.38, height 1.75
SOIC-8 [mm]
  rect 1.7x0.51 smd: 1(0,0) 2(0,-1.27) 3(0,-2.54) 4(0,-3.81) 5(5.5,-3.81) 6(5.5,-2.54) 7(5.5,-1.27) 8(5.5,0)
  silkscreen extent 0.35,-4.44 3.82,0.94
SOT-23 [mil]
  rect 36x36 smd: 1(-0.02,-0.41) 2(74.98,-0.41)
  rect 36x50 smd: 3(37.98,79.59)
  silkscreen extent -20,-5 95,85
SOT-223 [mm]
  rect 1.1x1.75 smd: 1(-2.3,-3.275) 2(0,-3.275) 3(2.3,-3.275)
  rect 5x3 smd: 2(0,3.937)
  silkscreen extent -3.55,-2.66 3.35,1.85
TESTPOINT-TH_BD1.0#1 [mm]
  round 1.2 hole 1 paste+0 mask+0.05: 1(0,0)
  silkscreen extent -0.7,-0.7 0.7,0.7
TESTPOINT-TH_BD1.0#2 [mm]
  round 1.2 hole 1 paste+0 mask+0.102: 1(0,0)
  silkscreen extent -0.7,-0.7 0.7,0.7
TP [mil]
  round 62 hole 32: 1(0,0)
  silkscreen extent -50,-50 50,50
URB-YMD-15WR3 [mm]
  rect 2.4x2.4 hole 1.2: 1(0,0)
  round 2.4 hole 1.2: 2(0,-7.62) 3(0,-12.7) 4(20.32,-20.32) 5(20.32,-10.16) 6(20.32,0)
  silkscreen extent -2.67,-22.86 22.99,2.54
VRB_S-6WR3 [mm]
  rect 1.8x1.8 hole 0.9: 1(0,0)
  round 1.8 hole 0.9: 2(0,-2.54) 3(0,-5.08) 5(0,-10.16) 6(0,-12.7) 7(0,-15.24) 8(0,-17.78)
  silkscreen extent -6.86,-20.32 2.79,2.54
接地柱M3 [mm]
  rect 4.5x4.5 hole 3: 1(0,0)
  silkscreen extent -2.54,-2.54 2.54,2.54

## Part data
C1 C3 C4 C5 C6 C11 C12 C13 C21 C24 C25 C26 C27 C29: library part "Cap Pol1", "Polarized Capacitor (Radial)", LatestRevisionDate=17-Jul-2002, LatestRevisionNote="Re-released for DXP Platform.", Published=8-Jun-2000, Publisher="Altium Limited"
  C1 C3 C4 C5 C6 C11 C12 C13 C26 C27: ClassName=Power
C2 C7 C28 C30 C31 C32 C33 C34 C35 C36 C37 C38 C39 C42 C43 C44: library part Cap, "Capacitor", LatestRevisionDate=17-Jul-2002, LatestRevisionNote="Re-released for DXP Platform.", PackageReference=RAD-0.3, Published=8-Jun-2000, Publisher="Altium Limited"
  C2 C28: ClassName=Power
  C7 C33 C35 C36 C42 C43 C44: ClassName=Encoder
C8 C9 C10 C14 C15 C16 C19 C20: library part "Cap Semi", "Capacitor (Semiconductor SIM Model)", ClassName=Power, LatestRevisionDate=17-Jul-2002, LatestRevisionNote="Re-released for DXP Platform.", PackageReference=C1206, Published=8-Jun-2000, Publisher="Altium Limited"
C17 C18: library part "Cap Pol3", "Polarized Capacitor (Surface Mount)", ClassName=Power, LatestRevisionDate=29-May-2009, LatestRevisionNote="IPC-7351 Footprint Added.", PackageDescription="Chip Capacitor", PackageReference=C0805, Published=8-Jun-2000, Publisher="Altium Limited"
C22 C23: library part CAP, "Capacitor"
CN1 CN2 CN3 CN4: "连接器类型:简牛座;每排PIN数:20;排数:2;间距:1.27mm;行距:1.27mm;封装形式:直插;触头材质:黄铜;触头镀层:金;", JLCPCB Part Class="Extended Part", LCSC Part Name="每排P数:20 排数:2 1.27mm", Manufacturer=Wcon(维峰电子), Add into BOM=yes, Connector Type=简牛座, Contact Material=黄铜, Contact Plating=金, Convert to PCB=yes, Datasheet=https://atta.szlcsc.com/upload/public/pdf/source/20210304/C976754_BF257D3FF426E047B764690466F062CF.pdf, Device=3131-40SG0BK00T1, Holder Type=直插, Manufacturer Part=3131-40SG0BK00T1, Name=3131-40SG0BK00T1, Number of Rows=2, Pin Number in each Row=20, Pitch=1.27mm, Row Spacing=1.27mm, Supplier=LCSC, Supplier Footprint=插件,P=1.27mm, Supplier Part=C976754, Symbol=3131-40SG0BK00T1
D1 D2 D30 D31: library part LED0, "Typical INFRARED GaAs LED", ClassName=HelloDSP, LatestRevisionDate=08-Jul-2005, LatestRevisionNote="Mech Layer 1 removed.", PackageDescription="LED; 2 Leads", PackageReference=LED-0, Published=8-Jun-2000, Publisher="Altium Limited"
D3: library part "Diode 1N4148", "High Conductance Fast Diode", Code_JEDEC=DO-204-AH, ComponentLink1Description="Manufacturer Link", ComponentLink1URL=http://www.fairchildsemi.com/, ComponentLink2Description=Datasheet, ComponentLink2URL=http://www.fairchildsemi.com/ds/1N%2F1N4148.pdf, DatasheetDocument=1997, LatestRevisionDate=17-Jul-2002, LatestRevisionNote="Re-released for DXP Platform.", PackageReference=DO-35, Published=8-Jun-2000, Publisher="Altium Limited"
D4 D5: library part "Diode 1N5408", "3 Amp Medium Power Silicon Rectifier Diode", ComponentLink1Description="Manufacturer Link", ComponentLink1URL=http://www.irf.com/, DatasheetDocument=Aug-1984, LatestRevisionDate=17-Jul-2002, LatestRevisionNote="Re-released for DXP Platform.", PackageReference=DO-201AD, Published=8-Jun-2000, Publisher="Altium Limited"
D6 D7 D8 D9 D10 D11 D12 D13 D14 D15 D16 D17 D18 D19 D20 D21 D22 D23 D24 D25 D26 D27 D28 D29: library part MMBD1203二三极管
J1 J9 J10 J11 J12 J17: "Connector", Arrow Part Number=HIF3FC-20PA-2.54DSA(71), Manufacturer_Name=Hirose, Mouser Part Number=798-HIF3FC20PA254D71, Arrow Price/Stock=https://www.arrow.com/en/products/hif3fc-20pa-2.54dsa-71/hirose-electric?region=nac, Datasheet Link=https://www.hirose.com/product/en/products/HIF3FC/HIF3FC-20PA-2.54DSA%2871%29/, Height=9.5mm, Manufacturer_Part_Number=HIF3FC-20PA-2.54DSA(71), Mouser Price/Stock=https://www.mouser.co.uk/ProductDetail/Hirose-Connector/HIF3FC-20PA-254DSA71?qs=eDUdFcBPps3XO21sCrEU%252BQ%3D%3D
  J1 J9 J12 J17: System=Connector
J2 J8: "Header, 4-Pin", LatestRevisionDate=17-Jul-2002, LatestRevisionNote="Re-released for DXP Platform.", Publisher="Altium Limited"
  J2: ClassName=Power
  J8: ClassName=Encoder
J3 J4 J5 J6 J7 J18 J19 J20 J21: "Header, 2-Pin", LatestRevisionDate=17-Jul-2002, LatestRevisionNote="Re-released for DXP Platform.", Publisher="Altium Limited"
  J3: ClassName=Power
J13 J14: library part HIF3FC-10PA-2.54DSA_71_, "Connector", Manufacturer_Name=Hirose, Manufacturer_Part_Number=HIF3FC-10PA-2.54DSA(71), Mouser Part Number=798-HIF3FC10PA254D71, Datasheet Link=https://componentsearchengine.com/Datasheets/1/HIF3FC-10PA-2.54DSA(71).pdf, Height=9.2mm, Mouser Price/Stock=https://www.mouser.co.uk/ProductDetail/Hirose-Connector/HIF3FC-10PA-2.54DSA71?qs=eDUdFcBPps26f2LJxn%252B8VA%3D%3D, System=Connector
J15 J16: "Connector", Manufacturer_Name=Hirose, Manufacturer_Part_Number=HIF3FC-10PA-2.54DSA(71), Mouser Part Number=798-HIF3FC10PA254D71, Datasheet Link=https://componentsearchengine.com/Datasheets/1/HIF3FC-10PA-2.54DSA(71).pdf, Height=9.2mm, Mouser Price/Stock=https://www.mouser.co.uk/ProductDetail/Hirose-Connector/HIF3FC-10PA-2.54DSA71?qs=eDUdFcBPps26f2LJxn%252B8VA%3D%3D
  J15: System=Connector
L1: library part Inductor, "Inductor 31 Ohms @ 100 MHz 1 Ferrite Bead 1206 (3216 Metric) 2A 50mOhm", Code_IEC=1005, Code_JEITA=0402, LatestRevisionDate=17-Jul-2002, LatestRevisionNote="Re-released for DXP Platform.", PackageReference=0402-A, Published=8-Jun-2000, Publisher="Altium Limited"
L2: library part Inductor, "Inductor 铁氧体磁珠 220 OHM 25% 2A Alternate Sizing Guide Below", Code_IEC=1005, Code_JEITA=0402, LatestRevisionDate=17-Jul-2002, LatestRevisionNote="Re-released for DXP Platform.", PackageReference=0402-A, Published=8-Jun-2000, Publisher="Altium Limited"
L3: library part INDUCTOR1, "INDUCTOR"
Q1 Q2 Q3 Q4: library part NPN, "NPN Bipolar Transistor", ClassName=HelloDSP, Code_JEDEC=TO-226-AA, LatestRevisionDate=17-Jul-2002, LatestRevisionNote="Re-released for DXP Platform.", PackageDescription="TO, Flat Index; 3 In-Line, Axial Leads; Body Dia. 4.8mm; Leads 0.55 x 0.51 mm (max)", PackageReference=TO-226-AA, Published=8-Jun-2000, Publisher="Altium Limited"
R1 R2 R3 R5 R6 R7 R8 R9 R10 R11 R12 R13 R14 R15 R16 R17 R18 R19 R20 R21 R22 R23 R24 R25 R26 R27 R28 R29 R30 R31 R32 R33 R34 R35 R36 R37 R38 R39 R40 R41 R42 R43 R44 R45 R46 R47 R48 R49 R50 R51 R52 R53 R54 R55 R56: library part Res2, "Resistor", LatestRevisionDate=17-Jul-2002, LatestRevisionNote="Re-released for DXP Platform.", PackageReference=AXIAL-0.4, Published=8-Jun-2000, Publisher="Altium Limited"
  R1 R2 R3 R47 R48: ClassName=Power
  R6 R13 R30 R31 R32 R33 R34 R35 R49 R50 R51 R52 R53 R54: ClassName=HelloDSP
  R7 R8 R9 R10 R11 R12 R14 R16 R20 R21 R28 R29 R36 R37 R39 R40 R42 R43: ClassName=Encoder
R4: library part RES
TP4 TP5 TP6 TP7 U6 U7: JLCPCB Part Class="Extended Part", Add into BOM=yes, Convert to PCB=yes, Datasheet=https://atta.szlcsc.comnull, Device=TP-黄色测试点, LCSC Part Name=TP-黄色测试点, Manufacturer Part=TP-黄色测试点, Name=TP-黄色测试点, Supplier=LCSC, Supplier Footprint=TESTPOINT-TH_BD-2P-P2.00, Supplier Part=C9900007422, Symbol=TP-黄色测试点
TP8: library part 测试点, ClassName=HelloDSP
U1 U5: library part Component_1, ClassName=Power
U2: library part LM1117, ClassName=Power
U3: "Imported", ClassName=Power, Manufacturer_Part_Number=ADR423ARZ, RefDes=Refdes, Type=Type, Vendor=Vendor
U4: library part IC/VIPER12
Z1 Z2: library part ZENER, "Zener Diode"
U8: ClassName=Encoder

## Via types
v1: diameter 24, hole 12, Top Layer to Bottom Layer, 712 vias

## Nets (pads, with @x,y where several pads share a name; then routed paths per layer and width w, separated by ;. In a path a pad name is that pad's centre, name@x,y a point inside that pad or via, vN(x,y) a via of type N, cw(c..) or ccw(c..) an arc to the next point about the centre after c; other vN are vias at no path point)
+15V_Raw: C29.1 D4.1 J20.1 L3.2 R4.1 Z2.2 | length 7939.6
  Top Layer w15: Z2.2@570,3212.99 Z2.2@572.99,3210
  Top Layer w30: C29.1@160,2200 250,2110 467.16,2110 538.19,2181.02 D4.1@550,2181.02 561.81,2181.02 614.31,2233.52 614.31,2633.52 580,2667.82 R4.1@580,2990 Z2.2@580,3202.99 ; v1(550,3437) 550,3232.99 Z2.2@570,3212.99
  Layer 2 w30: v1(550,3437) 550,4150 480,4220 223.15,4220 L3.2@133.15,4130 133.15,4302.43 150.72,4320 3266.79,4320 3284.36,4337.57 3284.36,4986.79 3347.57,5050 3472.86,5050 J20.1@3482.86,5040 J20.1@3482.86,5236.85 3482.86,5252.86 3540,5310 3722.43,5310 3740,5292.43 3740,5281.69 3766.32,5255.37 J20.1@3766.32,5236.85 J20.1@3766.32,5040
-5V_ADC: C27.2 C28.2 J12.17 J12.19 U5.7 | length 4649.2
  Top Layer w25: 2780,2840.13 U5.7@2780,3060 ; 2812.06,3081 2821.19,3081 2870.98,3130.79 3383.15,3130.79 3397.5,3116.43 3424.13,3116.43 3603.5,2937.06
  Top Layer w30: 2780,2840.13 2785.94,2834.19 2785.94,2814.69 C28.2@2790.63,2810 ; U5.7@2787.82,3050.25 2787.82,3056.76 2812.06,3081 ; 3603.5,2937.06 3603.5,2906.5 C27.2@3620,2890 3620,2990 3730,3100 v1(3750,3100) ; v1(3750,3240) 3750,3972.43 3767.57,3990 4640,3990 v1(4650,4000)
  Layer 2 w30: v1(3750,3100) v1(3750,3240) ; v1(4650,4000) 4660,4010 4660,4392.43 4677.57,4410 5440,4410 5445.35,4404.65 5445.35,4355.56 J12.19@5450.91,4350 J12.17@5450.91,4250
\S\P\I\_\C\_\S\T\E\_\H\S: J12.2 P1.89 | length 4453.9
  Top Layer w8: P1.89@1580,2475 1679,2475 1685,2481 1685,2582.57 1727.43,2625 2035,2625 2074,2664 2074,2712.14 2079.86,2718 2089.11,2718 2112,2740.89 2112,2799.14 2117.86,2805 2355,2805 2656,3106 2808.22,3106 2858.01,3155.79 5325.31,3155.79 5330,3160.48 5330,3419.79 5350.91,3440.69 J12.2@5350.91,3450
A+5V: C11.1 C17.1 C19.2 C31.2 CN1.17 CN1.19 CN1.21 CN1.23 CN2.17 CN2.19 CN2.21 CN2.23 CN3.17 CN3.19 CN3.21 CN3.23 CN4.17 CN4.19 CN4.21 CN4.23 J12.18 J12.20 L1.2 N1.4 U3.2 | length 23515.7
  Top Layer w25: v1(-160,960) -170,950 -412.43,950 -430,967.57 ; v1(-40,590) v1(-40,720) ; v1(630,3890) 620,3900 -415.36,3900 -430,3885.36 -430,967.57 ; v1(810,2590) 809.22,2590.78 809.22,2669.22 C31.2@808.45,2670 808.45,2677.87 850,2719.43 v1(850,2720) ; v1(840,1978.5) 843.5,1982 1311.54,1982 1350,1943.54 v1(1350,1760) ; v1(890,3890) 1290,3890 ; N1.4@1183.54,3080 v1(1280,3080) ; v1@1290,3242 1290,3890 ; v1(2073.44,3885.44) 2068.89,3890 1290,3890 ; v1(2340,3890) 3320,3890 3480,4050 4049.55,4050 C11.1@4115.61,4116.06 ; C19.2@4070,459.37 4069.37,460 3984.64,460 3970,445.36 3970,370 4080,260 4080,-170 2510,-170 2430,-90 -430,-90 -430,967.57 ; C11.1@4115.61,4120 C11.1@4115.61,4116.06 ; C11.1@4115.61,4123.94 4220,4228.32 L1.2@4220,4353.23 ; J12.20@5350.91,4350 J12.18@5350.91,4250 5074.64,4250 5060,4235.36 5060,4080.71 5045.36,4066.07 4165.61,4066.07 C11.1@4115.61,4116.06
  Top Layer w30: v1(1288,3240) v1@1290,3242 ; C19.2@4070,459.37 4074.69,464.06 4173.82,464.06 C17.1@4180,470.24 4180,543.39 4226.61,590 U3.2@4333.46,590 ; C11.1@4115.61,4120 C11.1@4115.61,4123.94
  Layer 2 w25: v1(-160,960) -160,880 -34.64,880 ; v1(-40,590) -40,520 10,470 286.77,470 310.27,493.5 353.5,493.5 389.64,529.64 410.36,529.64 450,490 660,490 677.25,472.75 677.25,432.75 CN4.21@680,430 ; v1(-40,720) -40,874.64 -34.64,880 ; CN4.23@630,430 CN4.21@680,430 ; CN2.23@630,1356.67 CN2.21@680,1356.67 CN2.19@730,1356.67 CN2.17@780,1356.67 780,1624.91 821.09,1666 1256,1666 v1(1350,1760) ; CN1.23@630,1820 CN1.21@680,1820 CN1.19@730,1820 CN1.17@780,1820 780,1950 ; v1(630,3890) v1(890,3890) ; CN4.17@780,430 CN4.19@730,430 CN4.21@680,430 ; CN3.17@780,893.33 CN3.19@730,893.33 CN3.21@680,893.33 CN3.23@630,893.33 630,985.36 597.86,1017.5 314.11,1017.5 311.11,1020.5 0.5,1020.5 -20,1000 -20,894.64 -34.64,880 ; v1(810,2590) 780,2560 780,1950 ; v1(840,1978.5) 840,1975.79 830,1965.79 830,1964.64 815.36,1950 780,1950 ; v1(850,2720) 910,2780 910,2970 940,3000 1255.36,3000 1270,3014.64 1270,3070 v1(1280,3080) ; v1(2073.44,3885.44) 2078,3890 v1(2340,3890)
  Layer 2 w30: v1(1280,3080) 1288,3088 v1(1288,3240)
AGND: C2.2 C3.2 C4.2 C7.2 C10.1 C11.2 C12.2 C13.2 C14.1 C15.1 C16.1 C17.2 C18.2 C19.1 C20.1 C27.1 C28.1 C31.1 C32.1 C33.2 C34.1 C35.1 C36.1 C38.1 C39.1 C42.2 C43.2 C44.2 CN1.18 CN1.20 CN1.25 CN1.27 CN1.29 CN1.31 CN1.32 CN2.18 CN2.20 CN2.25 CN2.27 CN2.29 CN2.31 CN2.32 CN3.18 CN3.20 CN3.25 CN3.27 CN3.29 CN3.31 CN3.32 CN4.18 CN4.20 CN4.25 CN4.27 CN4.29 CN4.31 CN4.32 D6.1 D7.1 D8.1 D9.1 D10.1 D11.1 D12.1 D13.1 D14.1 D15.1 D16.1 D17.1 D18.1 D19.1 D20.1 D21.1 D22.1 D23.1 D24.1 D27.1 J1.9 J1.10 J1.11 J1.12 J1.13 J8.4 J9.3 J9.6 J9.8 J9.10 J10.9 J10.10 J10.11 J10.12 J10.13 J11.9 J11.10 J11.11 J11.12 J11.13 J12.5 J12.7 J13.8 J14.8 J15.7 J15.8 J15.9 J15.10 J16.7 J16.8 J16.9 J16.10 J17.3 J17.6 J17.8 J17.10 N1.11 P1.7 P1.8 P1.9 P1.10 P1.157 P1.158 P1.159 P1.160 P1.161 P1.162 P1.163 P1.164 P1.189 P1.190 P1.191 P1.192 P1.217 P1.218 P1.219 P1.220 Q1.2 Q2.2 Q3.2 Q4.2 R1.2 R2.2 R7.2 R8.2 R13.1 R19.1 R26.1 R34.2 R35.2 R45.2 R46.2 R53.2 R54.2 R55.2 R56.2 TP7.1 TP8.1 U1.6 U2.1 U3.4 U5.6 U7.1 U8.1 U8.8 U8.15 | length 4539.9
  Top Layer w8: N1.11@1376.46,3080 1411.89,3080 1439.51,3052.38 v1(1439.5,3045.74) ; C34.1@1649.37,3020 v1(1710,3020) ; v1(1650,1860) 1650,1850 1674.31,1825.69 1674.31,1805.69 C36.1@1690,1790 1700,1780 1728,1780 v1(1730,1782) ; v1(1650,2730) 1670.63,2730 1677.07,2736.44 1684.94,2736.44 1700.63,2752.13 C32.1@1700.63,2760 ; C35.1@1690,1220 v1(1730,1220) ; R7.2@1690,1410 1710,1430 v1(1710,1450) ; R8.2@1690,1600 v1(1720,1600) ; R13.1@1768.74,1980 v1(1800,1980) ; R26.1@1768.74,2360 v1(1830,2360) ; C39.1@1810,2550 v1(1860,2550) ; v1(1899.85,1373) 1899.85,1376.66 1911.16,1387.97 1911.16,1392.59 1913.75,1390 U8.8@1941.02,1390 ; U8.1@1941.02,1740 1962.78,1740 1975,1752.22 v1(1975,1772) ; v1(1950,2520) C38.1@2000.63,2520 2000.63,2524.31 C38.1@1984.94,2540 ; C7.2@1969.37,1220 1979.37,1230 v1(2010,1230) ; C44.2@2080.63,1220 2080,1220.63 2080,1260 2090,1270 v1(2093,1270) ; v1(2100,2640) 2102,2642 D6.1@2102,2690 ; U8.15@2130,1690 2157.27,1690 2170,1677.27 2170,1674.69 2174.69,1670 v1(2178,1670) ; D7.1@2258,2600 v1(2300,2600) ; C43.2@2359.37,1797.5 2371.87,1810 v1(2410,1810) ; C42.2@2359.37,1990 v1(2410,1990) ; D9.1@2415,1040 v1(2450,1040) ; D8.1@2418,800 2418,838 v1(2420,840) ; v1(2480,1460) 2480,1440 2466.94,1426.94 2466.94,1410 C10.1@2490.63,1410 ; v1(2500,170) 2500,132 D10.1@2502,130 ; v1(2500,340) 2500,378 D11.1@2502,380 ; C33.2@2569.37,1220 2599.37,1250 v1(2620,1250) ; D27.1@2570.02,1040.41 2584.02,1026.41 2584.02,1005.98 2590,1000 v1(2600,1000) ; D13.1@2578,800 2578,838 v1(2580,840) ; D14.1@2659.98,379.59 2670,369.57 2670,344.69 2670.98,344.69 2675.67,340 v1(2680,340) ; D12.1@2669.98,129.59 2697.33,156.94 2706.94,156.94 v1(2710,160) ; v1(2670,1000) 2674.33,1000 2681.02,993.31 2683.31,993.31 2698.21,1008.21 2717.82,1008.21 D24.1@2750.02,1040.41 ; D15.1@2855,130 2860,125 v1(2860,113) ; C28.1@2869.37,2810 2870,2810.63 v1(2870,2870) ; D16.1@2920.02,800.41 2920.02,829.98 v1(2920,840) ; D22.1@3015,390 3020,395 3020,411.92 v1(3015.96,415.96) ; D20.1@3088,1040 v1(3120,1040) ; D17.1@3095,800 3100,805 v1(3100,840) ; v1(3150,1540) Q4.2@3150,1583 ; v1(3190,160) 3193.06,156.94 3200.38,156.94 3202,155.31 D21.1@3202,120 ; D23.1@3195,380 3205,370 v1(3230,370) ; R54.2@3228.74,1850 3230,1850 v1(3230,1790) ; R35.2@3229.37,2200 3229.37,2150.63 3230,2150 v1(3230,2130) ; Q3.2@3234.98,2599.59 3234.98,2565.02 v1(3240,2560) ; v1(3260,840) 3265,835 D19.1@3265,800 ; v1(3260,1080) 3260,1048 D18.1@3268,1040 ; C27.1@3730.24,2890 v1(3800,2890) ; v1(3760,1738) 3762,1738 3770,1730 3770,1694.98 Q1.2@3765.02,1690 ; v1(4000,1360) 4010,1350 C15.1@4050.63,1350 ; C12.2@4050,1140 4060,1130 v1(4110,1130) ; C19.1@4070,380.63 4159.37,380.63 C17.2@4180,360 ; R53.2@4139.37,1880 v1(4190,1880) ; Q2.2@4150.78,1690 4150,1690 4160,1680 v1(4160,1660) ; v1(4170,4730) 4172.15,4732.15 C2.2@4172.15,4800 ; v1(4180,300) C17.2@4180,360 ; C3.2@4225.85,4582.34 4225.85,4655.85 v1(4230,4660) ; v1(4330,450) 4330,486.54 U3.4@4333.46,490 ; v1(4350,1340) 4350,1318.13 4354.69,1313.44 4361.31,1313.44 4390,1342.13 C14.1@4390,1350 ; C20.1@4371.26,220 4371.26,227.87 4340,259.13 4340,370 C18.2@4339.76,370 4190,370 C17.2@4180,360 ; U2.1@4390.55,1168.94 4438.94,1168.94 v1(4440,1170) ; v1(4470,1020) 4520,1020 C13.2@4530,1010 ; R34.2@4529.37,1880 v1(4580,1880) ; v1(4620,1320) C16.1@4620,1359.37
  Top Layer w15: v1(-80,5370) R45.2@-9.37,5370 ; v1(-60,4460) R46.2@-9.37,4460 ; v1(4900,4450) R56.2@4900,4500.63 ; R55.2@5080,4501.26 5138.74,4501.26 5140,4500 v1(5160,4500)
  Top Layer w30: C31.1@729.71,2670 730,2669.71 v1(730,2610) ; v1(750,2810) 750.63,2810.63 R19.1@750.63,2870 ; v1(4030,4150) 3974.65,4150 R2.2@3971.91,4147.26 R1.2@3971.91,4447.26 3974.65,4450 v1(4040,4450) ; C11.2@4225.85,4120 v1(4280,4120)
AVDD: C13.1 C16.2 D6.2 D7.2 D8.2 D9.2 D10.2 D11.2 D12.2 D13.2 D14.2 D15.2 D16.2 D17.2 D18.2 D19.2 D20.2 D21.2 D22.2 D23.2 D24.2 D27.2 L2.2 TP4.1 | length 10122.9
  Top Layer w25: D6.2@2177,2690 2177,2606 D7.2@2183,2600 2222.5,2639.5 2409.5,2639.5 v1(2410,2640) ; D8.2@2343,800 2343,856.84 2413.5,927.34 2413.5,935.65 2430,952.15 2430,990 2416.5,1003.5 2376.5,1003.5 D9.2@2340,1040 2360,1060 2360,1065.36 2374.64,1080 2534.61,1080 ; D13.2@2503,800 2508.52,805.52 2508.52,851.48 2495.02,864.98 D27.2@2495.02,1040.41 2534.61,1080 ; D11.2@2577,380 D10.2@2577,130 2580,127 v1(2580,-6) ; D24.2@2675.02,1040.41 2680,1045.39 2680,1065.36 2694.12,1079.47 ; v1(2697.51,-3) 2705.53,5.02 2744.98,5.02 D12.2@2744.98,129.59 2744.98,249.34 2734.98,259.34 D14.2@2734.98,379.59 ; 2744.98,-2.49 2915.36,-2.49 2930,12.16 2930,80 ; D16.2@2845.02,800.41 2845.02,865.36 ; D15.2@2930,130 2930,80 ; v1(2990,1110) 3007.5,1092.5 3007.5,1065.36 ; D17.2@3020,800 3020,850 2990,880 ; D22.2@3090,390 3143.86,390 3158.5,404.64 3158.5,405.66 3169.34,416.5 3233.5,416.5 D23.2@3270,380 3317,380 ; D18.2@3193,1040 3187.5,1045.5 3187.5,1075.5 3183,1080 3033.14,1080 3018.5,1065.36 3018.5,1045.5 D20.2@3013,1040 3007.5,1034.5 2984.64,1034.5 2970,1019.86 2970,880 ; 4520.31,1260.63 4615.36,1260.63 C16.2@4630,1275.27 ; C13.1@4525,1135 4525,1255.94 ; TP4.1@4530,790 4690,790 ; C13.1@4530,1130 4672.43,1130 4690,1112.43 4690,790 ; 2534.61,1080 2610,1080 2610.53,1079.47 2694.12,1079.47 ; 2694.12,1079.47 2791.86,1079.47 2806.5,1064.83 2806.5,903.88 2845.02,865.36 ; 2845.02,865.36 2859.67,880 2970,880 ; 2930,80 2930.5,80.5 3265.86,80.5 3280,94.64 3280,117 D21.2@3277,120 3277,230 3317,270 3317,380 ; 2970,880 2990,880 ; 2990,880 3175.36,880 3190,865.36 D19.2@3190,800 3226.5,763.5 3252.66,763.5 3263.5,752.66 3263.5,648.08 3260,644.58 3260,550 3420,390 ; 3317,380 3410,380 3420,390 ; 3420,390 3520,490 3520,535.36 3534.64,550 4139.23,550 4260.27,671.04 4592.16,671.04 4603.2,660 4670,660 4690,680 4690,790
  Top Layer w30: L2.2@4490,1260.63 4490.31,1260.63 L2.2@4495,1255.94 ; C13.1@4525,1125.24 C13.1@4530,1120.24
  Layer 2 w25: v1(2410,2640) 2975.36,2640 2990,2625.36 v1(2990,1110) ; v1(2580,-6) 2694.51,-6 v1(2697.51,-3)
BootFromFlash: P1.119 R6.1 R13.2 | length 784.5
  Top Layer w8: v1(1690,2110) R6.1@1690,2170 ; v1(1730,2010) 1728.44,2011.56 1713.68,2011.56 1685,1982.87 1685,1975 1680,1970 1830,1820 v1(1830,1762)
  Layer 2 w8: P1.119@1580,1725 1693.09,1725 1728.09,1760 1828,1760 v1(1830,1762) ; v1(1690,2110) 1690,2060 1730,2020 v1(1730,2010)
D12V1: C1.1 C5.1 C6.1 C8.2 C9.2 C26.1 CN1.1 CN1.2 CN1.3 CN1.4 CN1.5 CN1.6 CN2.1 CN2.2 CN2.3 CN2.4 CN2.5 CN2.6 CN3.1 CN3.2 CN3.3 CN3.4 CN3.5 CN3.6 CN4.1 CN4.2 CN4.3 CN4.4 CN4.5 CN4.6 J2.1 J2.2 J13.1 J13.3 J14.1 J14.3 J18.1 U1.3 U5.2 | length 17948.4
  Top Layer w15: J18.1@4720,5236.85 J18.1@4726.85,5236.85 ; J18.1@4983.15,5236.85 J18.1@5003.46,5236.85 ; J18.1@5003.46,5032.6 J18.1@5003.46,5040 ; C5.1@5206.06,4830 C5.1@5210,4830 C5.1@5210.63,4829.37
  Top Layer w25: v1(3850,3610) v1(3850,3760) ; v1(4150,2910) v1(4150,3120) ; J13.1@4980,1500 J13.3@4980,1600
  Top Layer w30: J18.1@4720,5040 J18.1@4720,5236.85 ; J18.1@4726.85,5236.85 4770,5280 4940,5280 J18.1@4983.15,5236.85 ; J18.1@5003.46,5032.6 C5.1@5206.06,4830 ; J18.1@5003.46,5040 J18.1@5003.46,5236.85 ; C5.1@5210.63,4829.37 C8.2@5550,4829.37 ; J2.1@5260,5120 J2.2@5410,5120 ; J2.2@5410,5106.29 5410,4969.37 C8.2@5550,4829.37 ; C9.2@5690,4829.37 C8.2@5550,4829.37
  Layer 2 w25: CN4.6@1080,380 CN4.4@1130,380 CN4.2@1180,380 CN4.1@1180,430 CN4.3@1130,430 CN4.5@1080,430 1080,433.89 1068.18,445.7 1068.18,445.82 950,564 950,709.33 1077.25,836.58 1077.25,840.58 CN3.6@1080,843.33 ; CN3.2@1180,843.33 CN3.4@1130,843.33 CN3.6@1080,843.33 ; CN2.2@1180,1306.67 CN2.4@1130,1306.67 CN2.6@1080,1306.67 CN2.5@1080,1356.67 CN2.3@1130,1356.67 CN2.1@1180,1356.67 1403.33,1356.67 1470,1290 1470,990.91 1400,920.91 1400,914.64 1385.36,900 1186.67,900 CN3.1@1180,893.33 CN3.3@1130,893.33 CN3.5@1080,893.33 CN3.6@1080,843.33 ; CN1.2@1180,1770 CN1.4@1130,1770 CN1.6@1080,1770 CN1.5@1080,1820 CN1.3@1130,1820 CN1.1@1180,1820 1455.36,1820 1460,1834.64 ; 1470,1300 1470,2729.16 1432.17,2766.99 1432.17,2835 cw(c1555,2835) 1470,2923.67 1470,3370 1510,3410 2126,3410 C26.1@2356,3180 2370,3194 2370,3340 2390,3360 U1.3@3660,3360 3670,3370 3850,3370 ; C26.1@2356,3160 2356,3124 2570,2910 3200,2910 3280,2990 U5.2@3280,3060 ; v1(3850,3610) 3850,3370 ; v1(3850,3760) 3850,4761.93 3864.64,4776.57 4486.57,4776.57 4511.43,4776.57 4529,4759 C1.1@4529,4620 4660,4620 4720,4680 J18.1@4720,5040 ; v1(4150,2910) 4150,2360 4190,2320 5115.36,2320 5130,2305.36 5130,1614.64 ; v1(4150,3120) 4150,3355.36 4135.36,3370 3850,3370 ; J13.3@4980,1600 5115.36,1600 5130,1614.64 ; J14.3@4990,590 5115.36,590 5130,604.64 5130,1614.64
  Layer 2 w30: J14.1@4990,490 J14.3@4990,590
D12VGND: C1.2 C5.2 C6.2 C8.1 C9.1 C26.2 CN1.7 CN1.8 CN1.9 CN1.10 CN1.11 CN1.12 CN2.7 CN2.8 CN2.9 CN2.10 CN2.11 CN2.12 CN3.7 CN3.8 CN3.9 CN3.10 CN3.11 CN3.12 CN4.7 CN4.8 CN4.9 CN4.10 CN4.11 CN4.12 J2.3 J2.4 J13.7 J13.9 J14.7 J14.9 J19.1 R1.1 R2.1 R3.1 R55.1 R56.1 U1.2 U5.1 | length 3728.9
  Top Layer w10: R56.1@4900,4579.37 v1(4900,4640) ; R55.1@5080,4580 v1(5150,4580) ; v1(5790,4650) 5938.43,4650 R3.1@5942.74,4645.69
  Top Layer w15: J2.4@5710,5120 J2.4@5720,5110
  Top Layer w30: R1.1@3750,4461.57 R1.1@3735.69,4447.26 R2.1@3735.69,4147.26 3816.76,4147.26 v1(3819.5,4150) ; J19.1@4101.43,5040 J19.1@4101.43,5236.85 4116.85,5236.85 4160,5280 4323.23,5280 4366.38,5236.85 J19.1@4384.89,5236.85 J19.1@4384.89,5040 4705.13,4719.76 C5.2@5210,4719.76 C6.2@5390,4719.76 5519.13,4719.76 5537.44,4738.07 5537.44,4745.94 5542.13,4750.63 C8.1@5550,4750.63 5792.43,4750.63 5810,4768.2 5810,5020 J2.4@5720,5110 ; J2.3@5560,5120 J2.4@5710,5120
  Layer 1 w10: CN4.12@930,380 CN4.11@930,430 ; CN3.12@930,843.33 CN3.11@930,893.33 ; CN2.12@930,1306.67 CN2.11@930,1356.67 ; CN1.12@930,1770 CN1.11@930,1820
D+5V: C2.1 C3.1 C4.1 C10.2 C14.2 CN1.22 CN1.24 CN2.22 CN2.24 CN3.22 CN3.24 CN4.22 CN4.24 D1.1 D2.1 D30.1 D31.1 J1.14 J1.16 J8.1 J9.5 J9.7 J10.14 J10.16 J11.14 J11.16 J12.14 J12.16 J17.5 J17.7 L1.1 P1.1 P1.2 P1.3 P1.4 P1.5 P1.6 P1.81 P1.82 R6.2 U1.4 U2.3 | length 39372.6
  Top Layer w25: D2.1@3790,1353.33 3790,1347.43 3810,1327.43 3810,1240 ; v1(3895.45,794.55) 3894.8,795.2 D31.1@3894.8,910 3894.8,985.2 3810,1070 D30.1@3810,1130 3810,1240 ; v1(3990,1290) 3990,1240 ; 4209.45,1248.19 4201.26,1240 3990,1240 ; D1.1@4634.8,1629.28 4635.53,1630 v1(4730,1630) ; J11.16@5820,1180 J11.14@5820,1080 5820,1044.64 5834.64,1030 v1(6030,1030) ; 3810,1240 3990,1240
  Top Layer w30: v1(1770,2240) 1770,2171.26 R6.2@1768.74,2170 2612.43,2170 2630,2152.43 2630,1478.5 2569.37,1417.87 C10.2@2569.37,1410 ; v1(3170,4230) v1(3170,4400) 3332.43,4400 3350,4417.57 3350,4850 3390,4890 4003.41,4890 4080.85,4812.56 4088.72,4812.56 4093.41,4807.87 C2.1@4093.41,4800 4093.41,4608.48 4115.61,4586.27 C3.1@4115.61,4582.34 4114.66,4581.38 4114.66,4423.38 ; L1.1@4113.7,4353.23 4114.66,4354.19 4114.66,4423.38 ; U2.3@4209.45,1168.94 4209.45,1248.19 4254.07,1292.82 4261.95,1292.82 4311.26,1342.13 C14.2@4311.26,1350 ; C4.1@4524,4300 4524,4416 4500,4440 4131.27,4440 4114.66,4423.38
  Layer 2 w20: -430,1721.72 -418.28,1710 -295.69,1710 -283.98,1698.28 -283.98,1593.39 ; CN4.22@680,380 CN4.24@630,380 630,338.02 601.48,309.5 179.5,309.5 140.78,270.78 -313.09,270.78 -324.8,282.5 -324.8,674.28 ; CN3.22@680,843.33 CN3.24@630,843.33 630,801.35 538.65,710 257.38,710 253.88,713.5 226.12,713.5 186.91,674.28 -324.8,674.28 ; CN2.22@680,1306.67 CN2.24@630,1306.67 630,1264.69 537.06,1171.75 -323.05,1171.75 -324.8,1170 ; CN1.22@680,1770 CN1.24@630,1770 630,1700 650,1680 650,1605.11 638.28,1593.39 -283.98,1593.39 ; 3150,4400 3151.72,4401.72 3152.67,4400.77 3169.23,4400.77 v1(3170,4400) ; -324.8,674.28 -324.8,1170 ; -324.8,1170 -324.8,1552.57 -283.98,1593.39
  Layer 2 w25: -430,1721.72 -430,4385.36 -415.36,4400 500,4400 500,4895.36 485.36,4910 -200,4910 J8.1@-290,5000 ; 500,4400.77 3149.23,4400.77 3150,4400 ; v1(3895.45,794.55) 3895.45,34.64 3910.1,20 6075.36,20 6090,34.64 6090,340 ; v1(3990,1290) 4545.36,1290 4560,1304.64 4560,1540 4590.63,1570.63 4711.23,1570.63 4725.87,1585.27 4725.87,1625.87 v1(4730,1630) ; 4340,3250 4676.87,3250 4776.87,3350 4960,3350 ; J12.16@5350.91,4150 J12.14@5350.91,4050 5000,4050 4960,4010 4960,3350 ; J17.7@5450,780 J17.5@5450,680 5520,680 5860,340 6090,340 ; J9.5@5450.91,2165 J9.7@5450.91,2265 5744.39,2558.48 5813.48,2558.48 J10.14@5820,2565 5820,2568.78 5868.11,2616.89 ; J10.16@5820,2665 5868.11,2616.89 ; J1.14@5820,4050 5826.52,4056.52 5826.52,4108.13 ; J1.16@5820,4150 5826.52,4143.48 5826.52,4108.13 ; v1(6030,1030) 6090,1030 ; 4960,3350 6075.36,3350 6090,3335.36 ; 5826.52,4108.13 5834.64,4100 6070,4100 6090,4080 6090,3335.36 ; 5868.11,2616.89 6090,2616.89 ; 6090,340 6090,1030 ; 6090,1030 6090,2616.89 ; 6090,2616.89 6090,3335.36
  Layer 2 w30: P1.82@1530,2675 1580.5,2675 1585.5,2680 1585.5,2680.5 1607.5,2702.5 1630.83,2702.5 1636.33,2697 1663.67,2697 1676.67,2710 1910,2710 ; v1(1770,2240) 1780,2240 1910,2370 1910,2710 ; v1(3170,4230) 3170,3710 3190,3690 4328.28,3690 4340,3678.28 4340,3250 4340,3071.72 4351.72,3060 U1.4@4460,3060 3840,3060 3490,2710 ; P1.6@3365,2575 P1.5@3415,2575 P1.3@3415,2625 P1.4@3365,2625 P1.2@3365,2675 P1.1@3415,2675 3455,2675 3490,2710 ; 1910,2710 2620.66,2710 2655.66,2675 2690.66,2710 3375.9,2710 ccw(c3385,2835) 3394.1,2710 3490,2710
DC_BUS: C25.1 J4.1 R18.1 R47.2 U4.5 U4.6 U4.7 U4.8 | length 4096.1
  Top Layer w50: J4.1@673.46,5040 J4.1@673.46,5236.85 660.36,5236.85 622.47,5274.74 439.93,5274.74 402.04,5236.85 J4.1@390,5236.85 J4.1@390,5040 180,5040 110,4970 110,4529.29 139.29,4500 300,4500 R47.2@310,4490 586.3,4490 C25.1@976.3,4100 656.3,3780 U4.8@380,3780 U4.7@380,3680 U4.6@380,3580 U4.5@380,3480 381.73,3481.73 484.18,3481.73 485.45,3483 717,3483 750,3450 R18.1@750,3270
DC_BUS_SUS: C24.1 J5.1 R25.1 R47.1 | length 5068.3
  Top Layer w50: R47.1@310,4726.22 1931.93,4726.22 J5.1@2245.71,5040 J5.1@2245.71,5236.85 2246.85,5236.85 2320,5310 2475.68,5310 2519.91,5265.76 2519.91,5246.12 J5.1@2529.18,5236.85 J5.1@2529.18,5040 2529.18,4139.18 C24.1@2490,4100 2219.29,4100 2190,4070.71 R25.1@2190,3100
  Bottom Layer w20: J5.1@2245.71,5025.71 J5.1@2245.71,5040
DI-1-DSP-3.3V: P1.95 U8.3 | length 1123.5
  Top Layer w8: P1.95@1580,2325 1590.1,2325 1605.1,2310 1870,2310 1880,2300 v1(1880,2210) ; v1(1877.63,1890) 1880,1887.63 v1(1880,1680) ; U8.3@1941.02,1640 1969.76,1640 1997,1667.24 v1(1997,1670)
  Layer 2 w8: v1(1877.63,1890) 1878.82,1891.19 1878.82,2208.82 v1(1880,2210) ; v1(1880,1680) 1982.67,1680 1992.67,1670 v1(1997,1670)
DI-2-DSP-3.3V: P1.97 U8.5 | length 1113.3
  Top Layer w8: P1.97@1580,2275 1845,2275 1850,2270 v1(1850,2240) ; v1(1820,1690) 1820,1711.11 1852,1743.11 1852,1908 v1(1850,1910) ; v1(1830,1620) 1830,1575.77 1869.33,1536.44 1887.56,1536.44 1888.12,1537.01 1938.03,1537.01 U8.5@1941.02,1540
  Layer 2 w8: v1(1820,1690) 1820,1687.31 1830,1677.31 v1(1830,1620) ; v1(1850,1910) v1(1850,2240)
DI_1: C36.2 R8.1 R28.2 U8.2 | length 1100.7
  Top Layer w10: v1(1680,1870) 1680,1866.21 1685.86,1860.35 1685.86,1860 1698.74,1860 1746.18,1812.56 1754.06,1812.56 1768.74,1797.87 C36.2@1768.74,1790 1768.74,1751.26 1790,1730 v1(1790,1700) ; v1(1750,1667) 1752.36,1669.36 1760.64,1669.36 1768.74,1661.26 1768.74,1660 ; R8.1@1768.74,1600 1768.74,1660 ; v1(1810,1930) 1830,1950 1830,2014.14 1835.86,2020 2070.63,2020 2078.07,2012.56 2085.94,2012.56 2100.63,1997.87 R28.2@2100.63,1990 ; U8.2@1941.02,1690 1913.21,1690 1903,1679.79 1903,1670.47 1883.53,1651 1777.74,1651 1768.74,1660
  Layer 2 w10: v1(1680,1870) 1740,1930 v1(1810,1930) ; v1(1750,1667) 1757,1667 v1(1790,1700)
DI_2: C35.2 R7.1 R29.2 U8.4 | length 963.5
  Top Layer w10: C35.2@1768.74,1220 R7.1@1768.74,1410 1768.74,1417.87 1810.08,1459.21 v1(1810.08,1462.14) ; v1(1878.44,1558.44) 1878.44,1558.68 1909.76,1590 U8.4@1941.02,1590 1972.52,1590 2020,1637.48 2020,1784.14 1900.63,1903.51 R29.2@1900.63,1980
  Layer 2 w10: v1(1810.08,1462.14) 1810.08,1512.6 1843.73,1546.25 1859.91,1546.25 1872.1,1558.44 v1(1878.44,1558.44)